# Altium PCB PCB_LED_SHIELD_MOTOR_CONTROLLER_V2.PcbDoc
Units mil, origin at the board's own origin, x right, y up, seen from the top; angles counter-clockwise.
Board outline 1420 x 1420 mil, 4 copper layers (Top Layer, Signal Layer 1, Signal Layer 2, Bottom Layer), stack 30.634 mil thick; 140 components, 121 nets, 505 pads, 89 vias.
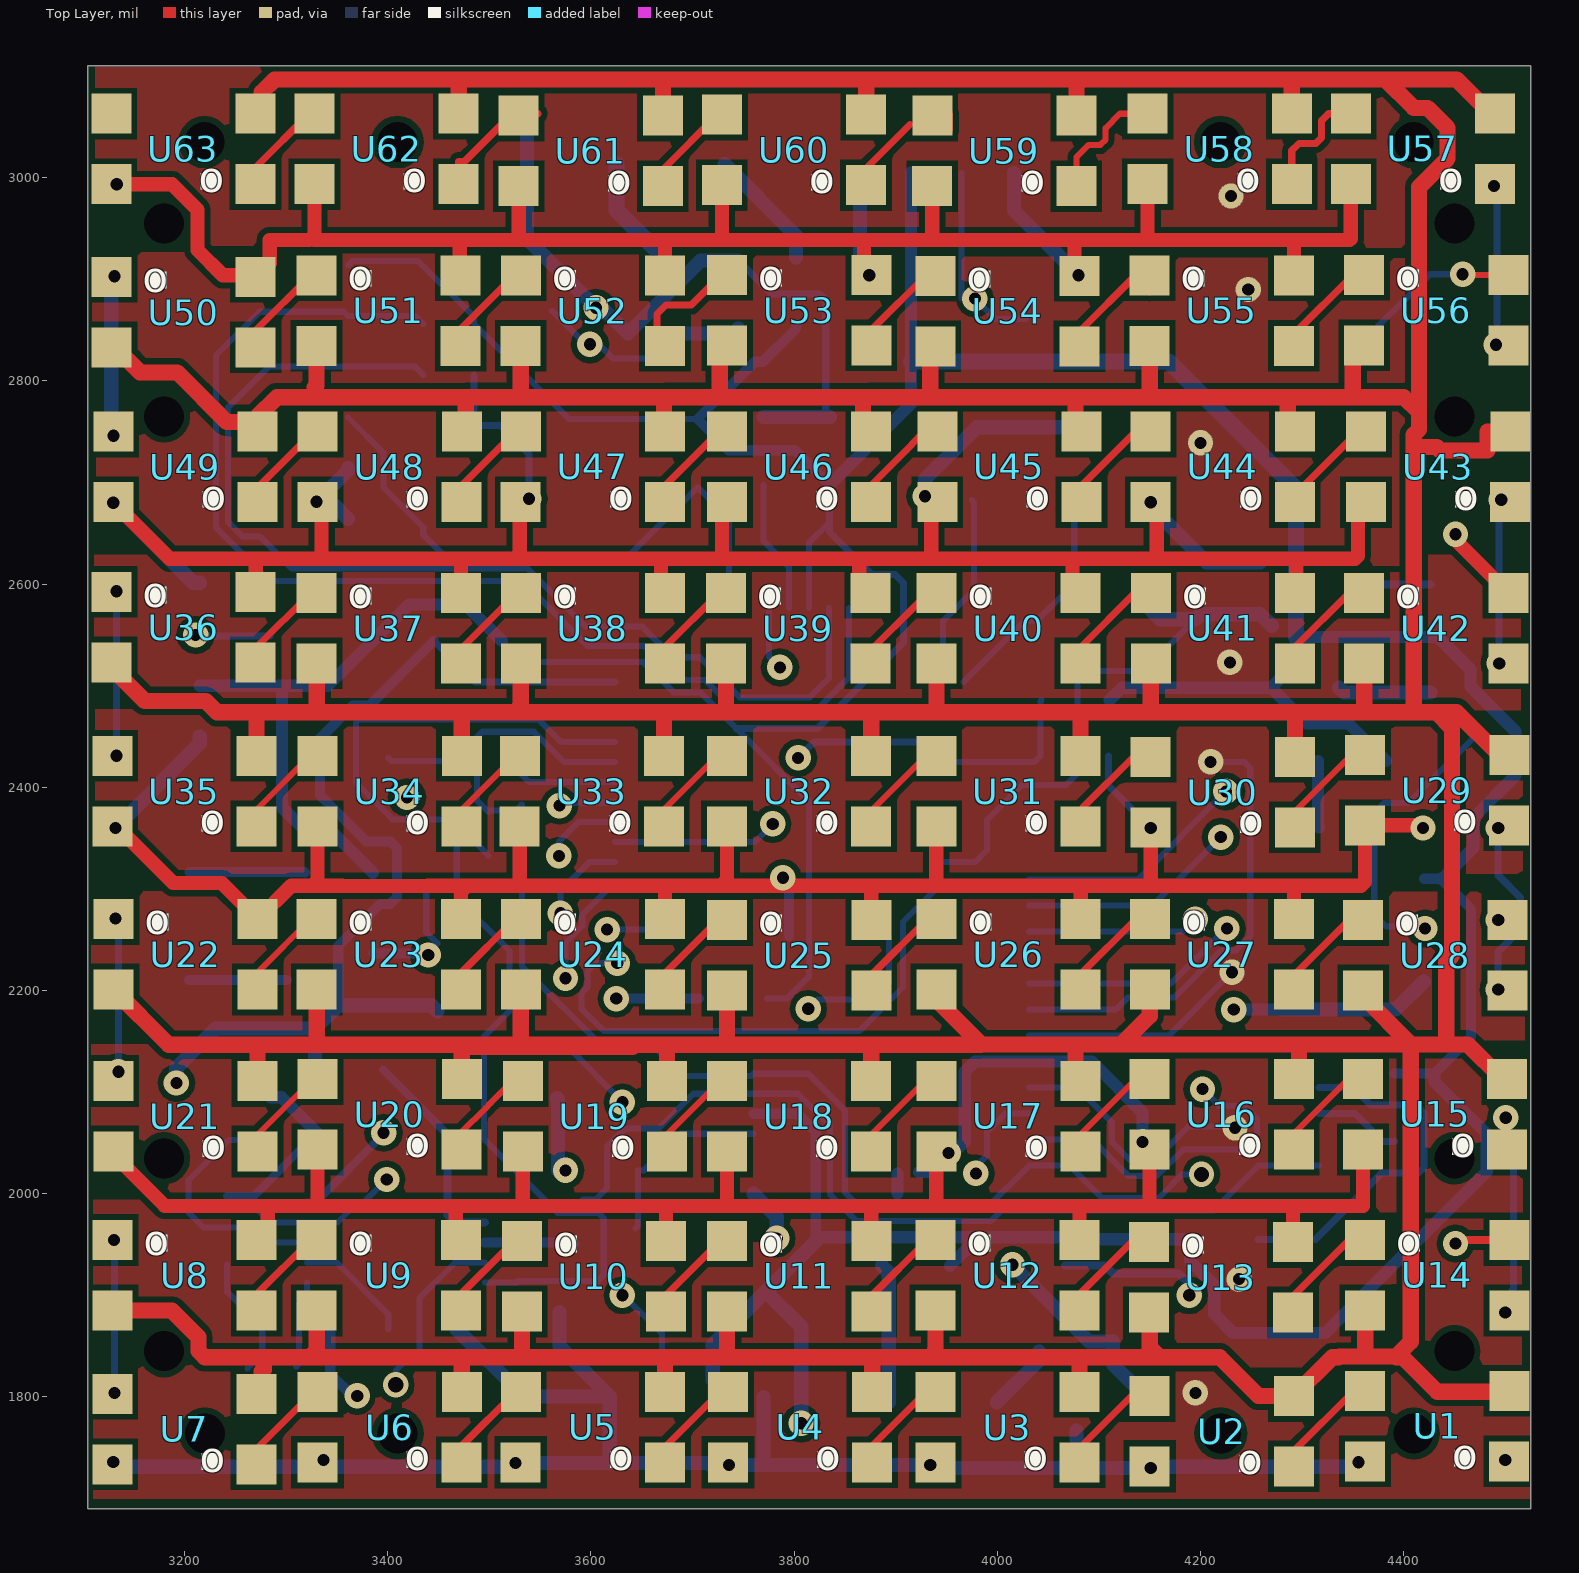
[diagram p0: Top Layer view]
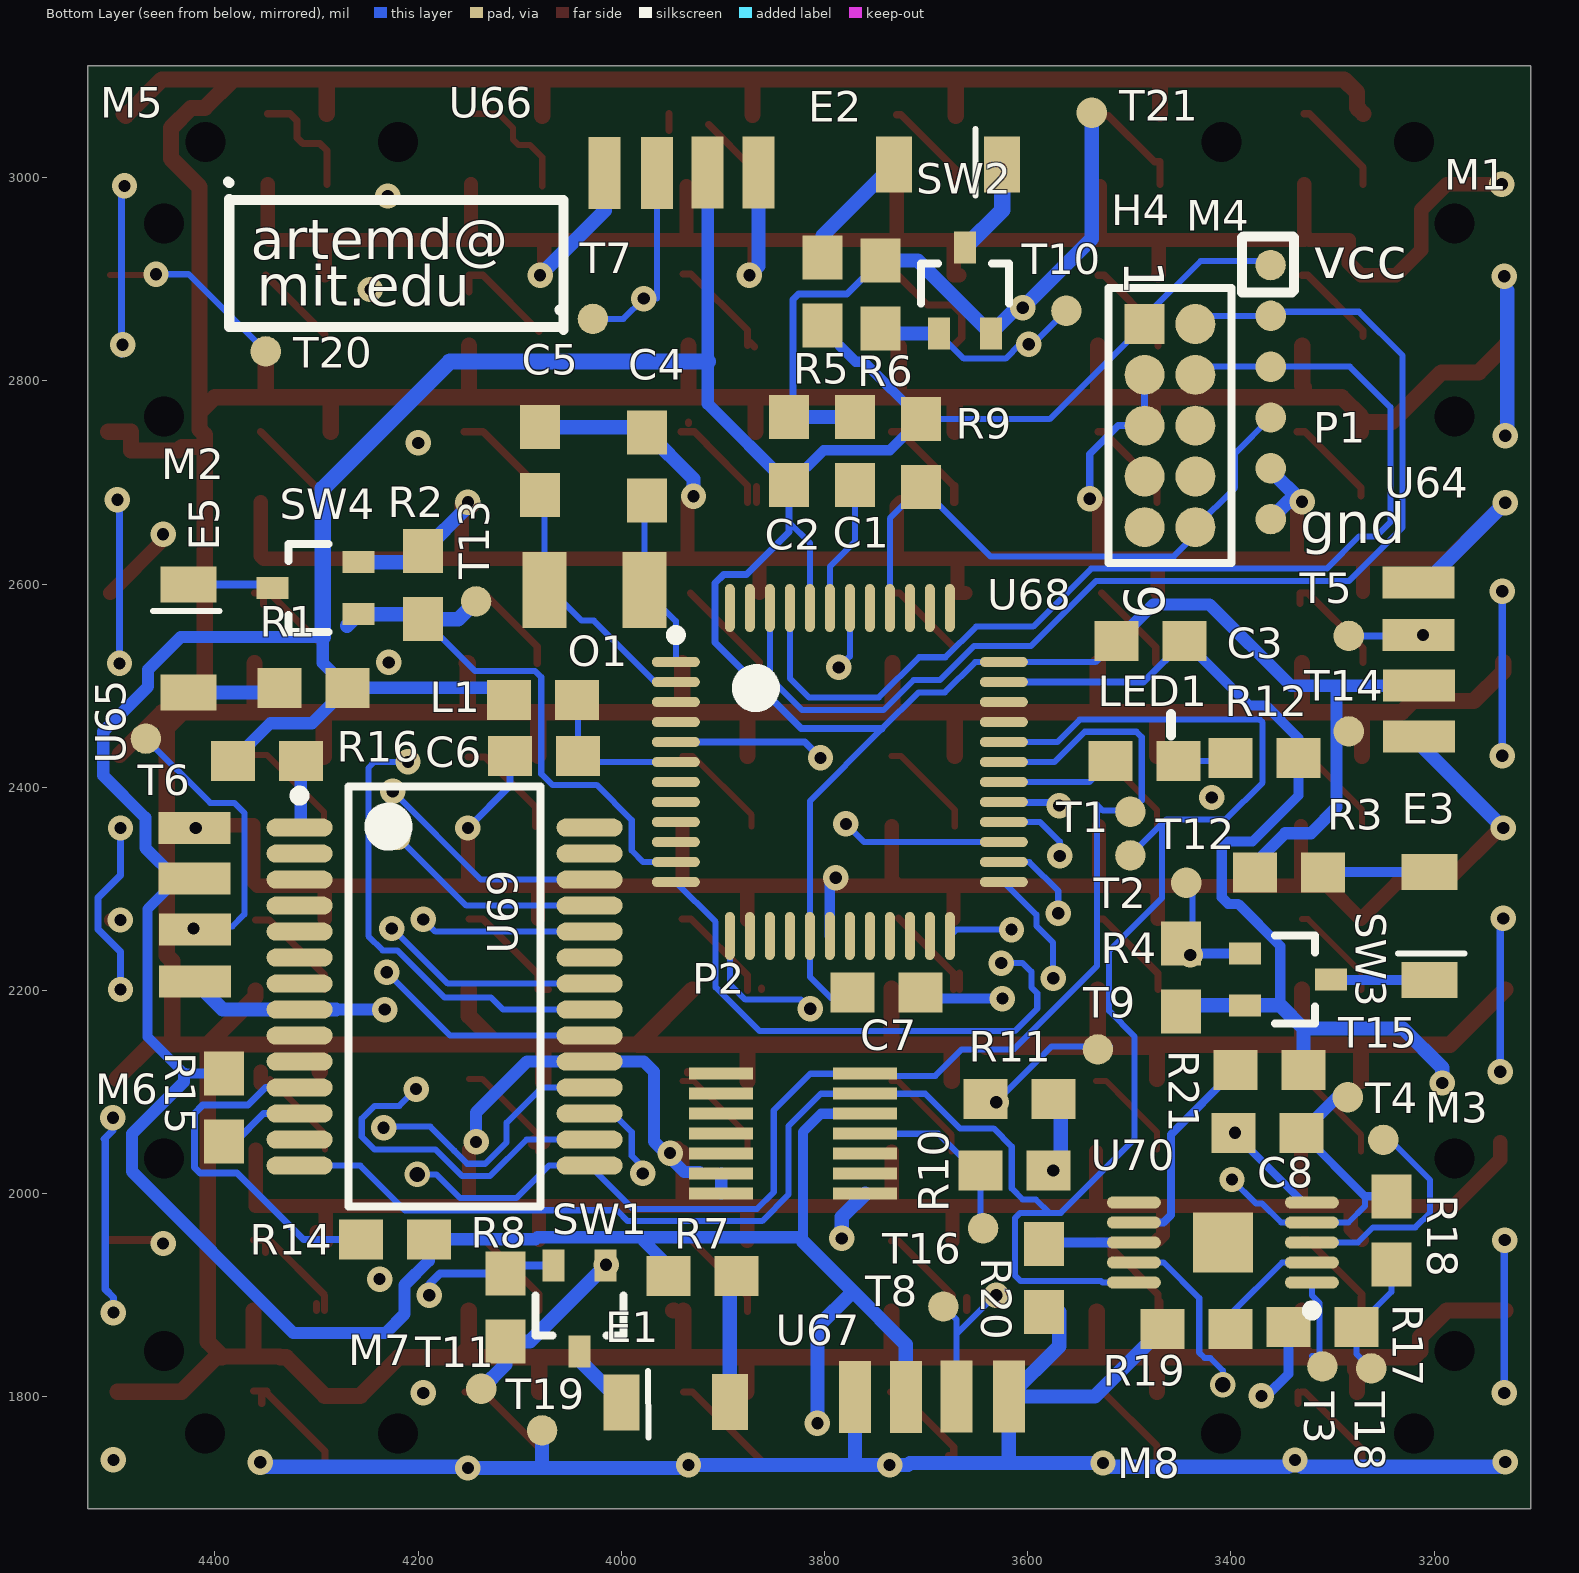
[diagram p1: Bottom Layer view, seen from below]
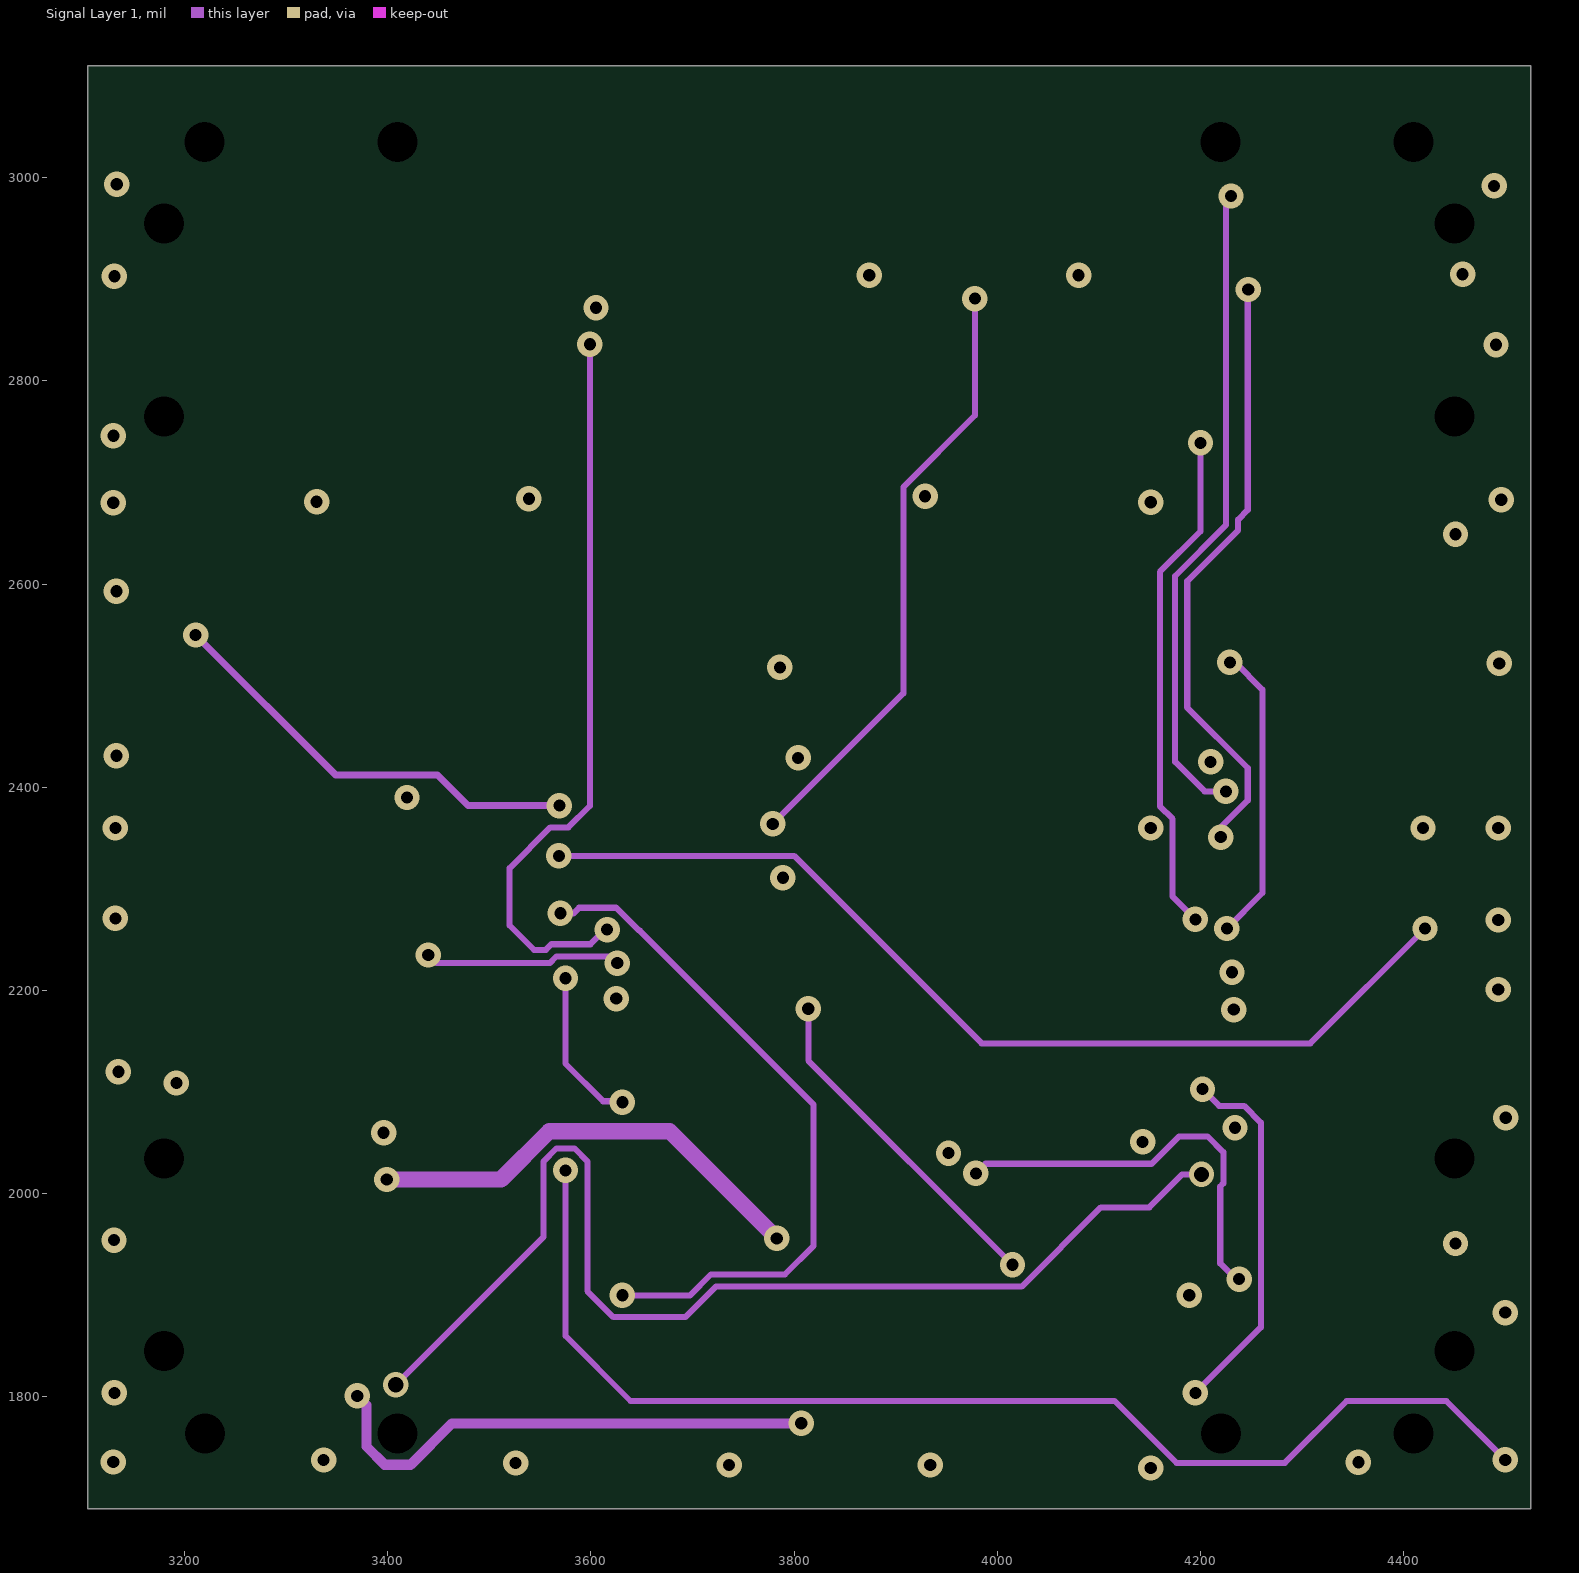
[diagram p2: Signal Layer 1]
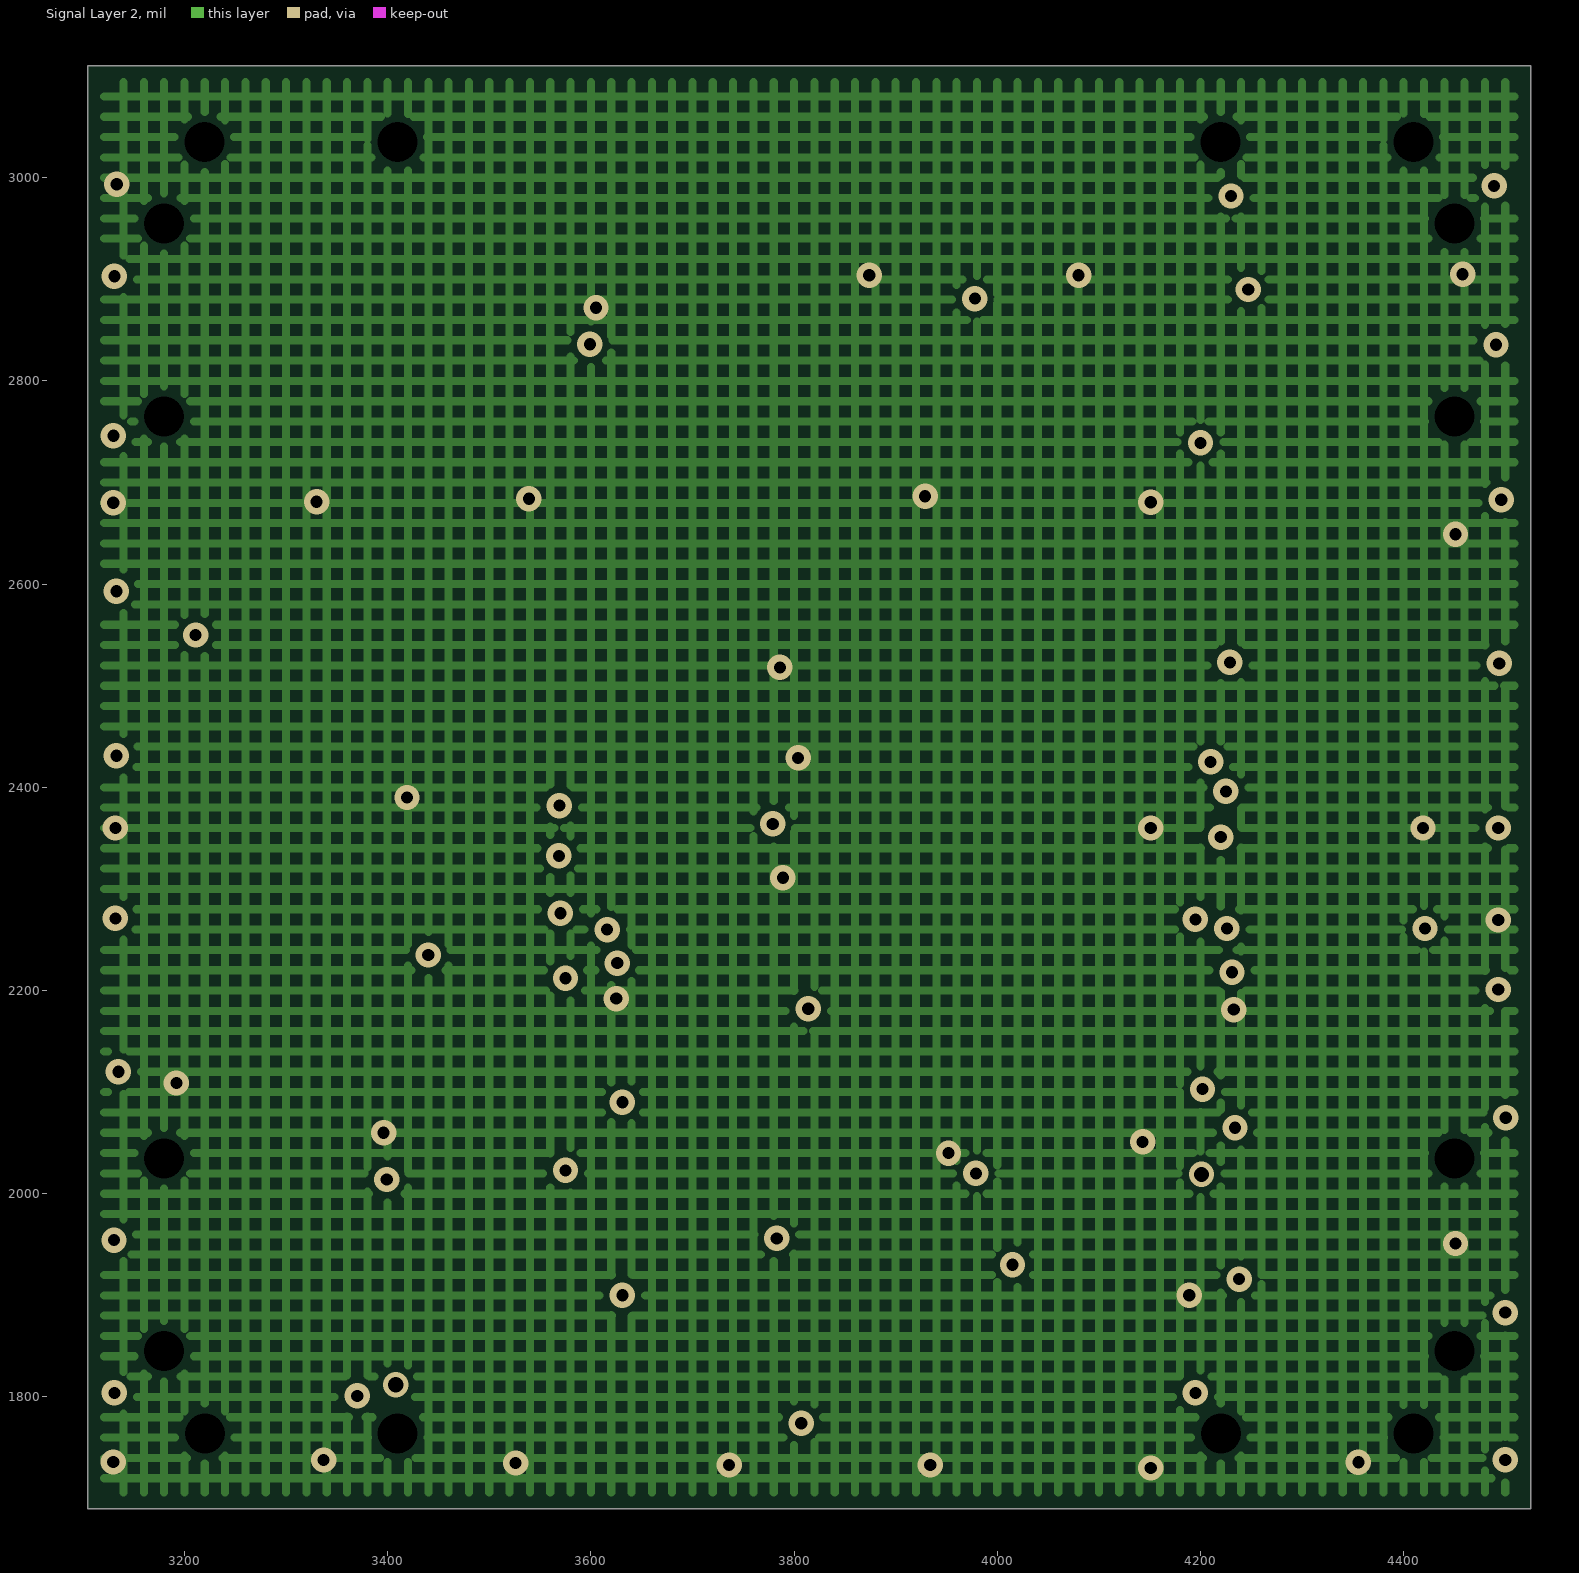
[diagram p3: Signal Layer 2]

## Layer stack, top to bottom
Top Solder: solder mask 0.4, Solder Resist, Dk 3.5
Top Layer: signal copper 1.4
Dielectric 1: core 10, FR-4, Dk 4.2
Signal Layer 1: signal copper 1.417
Dielectric 3: prepreg 5, Dk 4.2
Signal Layer 2: signal copper 1.417
Dielectric 2: core 10, Dk 4.2
Bottom Layer: signal copper 1.4
Bottom Solder: solder mask 0.4, Solder Resist, Dk 3.5

## Board outline
3105,1690 4525,1690 4525,3110 3105,3110

## Design rules (kind name [scope] priority, off if disabled: settings)
Clearance [All] p1: gap=6
ComponentClearance [All] p1: gap=3.94 collisioncheckmode=3 verticalgap=10 showdistances=TRUE
PolygonConnect [All] p1: connectstyle=Direct reliefconductorwidth=10 reliefentries=4 polygonreliefangle="90 Angle" airgapwidth=10
RoutingVias [All] p1: holewidth=15 width=12 viastyle="Through Hole" minholewidth=10 minwidth=12 maxholewidth=100 maxwidth=100
SolderMaskExpansion [All] p1: expansion=4
Width [All] p1: maxlimit=20 minlimit=6 preferedwidth=7
29 further rules are at their usual default settings.

## Classes and differential pairs
component class Schematic_LED_SHIELD_MOTOR_CONTROLLER_V2: U1 U2 U3 U4 U5 U6 U7 U8 U9 U10 U11 U12 U13 U14 U15 U16 U17 U18 U19 U20 U21 U22 U23 U24 U25 U26 U27 U28 U29 U30 U31 U32 U33 U34 U35 U36 U37 U38 U39 U40 U41 U42 U43 U44 U45 U46 U47 U48 U49 U50 U51 U52 U53 U54 U55 U56 U57 U58 U59 U60 U61 U62 U63
component class Schematic_LED_SHIELD_DIGITAL: C1 C2 C4 C5 C6 C7 C8 E1 E2 E3 E5 H4 L1 LED1 M1 M2 M3 M4 M5 M6 M7 M8 O1 P1 P2 R1 R2 R3 R4 R5 R6 R7 R8 R9 R10 R11 R12 R14 R15 R16 R17 R18 R19 R20 R21 SW1 SW2 SW3 SW4 T1 T2 T3 T4 T5 T6 T7 T8 T9 T10 T11 T12 T13 T14 T15 T16 T18 T19 T20 T21 U64 U65 U66 U67 U68 U69 U70

## Components (designator, comment, footprint, x,y, rotation, side; value= is the part's Value field where it differs from the comment)
C1 "0.1uF" 0603W 3770,2730 r90 bottom
C2 "0.1uF" 0603W 3835,2730 r90 bottom
C3 "0.1uF" 0603W 3478,2544 r0 bottom
C4 "18pF" 0603W 3975,2715 r90 bottom
C5 "18pF" 0603W 4080,2720 r90 bottom
C6 "0.1uF" 0603W 4077,2431 r180 bottom
C7 "0.1uF" 0603W 3738,2198 r0 bottom
C8 "10uF" 0603W 3365,2060 r180 bottom
E1 "SFH 4045N" "SFH 4045N" 3915,1775 r180 bottom
E2 "SFH 4045N" "SFH 4045N" 3710,3033 r0 bottom
E3 "SFH 4045N" "SFH 4045N" 3185,2295 r90 bottom
E5 "SFH 4045N" "SFH 4045N" 4446,2515 r270 bottom
H4 "MHDR2X5" MHDR2X5 3485,2856 r270 bottom
L1 "Ferrite bead" 0603W 4076,2486 r0 bottom
LED1 "LED RED" 0603W 3486,2426 r180 bottom
M1 "Custom_magnet_holder" 3mm_magnet_holder 3180.01,2942.48 r270 bottom
M2 "Custom_magnet_holder" 3mm_magnet_holder 4449.98,2777.62 r90 bottom
M3 "Custom_magnet_holder" 3mm_magnet_holder 3180.02,2022.38 r270 bottom
M4 "Custom_magnet_holder" 3mm_magnet_holder 3397,3035 r180 bottom
M5 "Custom_magnet_holder" 3mm_magnet_holder 4397,3035 r180 bottom
M6 "Custom_magnet_holder" 3mm_magnet_holder 4449.99,1857.52 r90 bottom
M7 "Custom_magnet_holder" 3mm_magnet_holder 4232.52,1764.01 r0 bottom
M8 "Custom_magnet_holder" 3mm_magnet_holder 3232.52,1764.01 r0 bottom
O1 "32.768 kHz" "32.768 Crystal" 3980,2595 r0 bottom
P1 "6 pin smd 1.27mm female" "6pos 1.27mm" 3361,2914 r270 bottom
P2 "CONN HEADER 14POS 3MM SMD 0.5MM" "DF12 14Pos Female" 3760,2000 r90 bottom
R1 "300" 0603W 4302,2498 r0 bottom
R2 "10K" 0603W 4195,2598 r90 bottom
R3 "300" 0603W 3344,2316 r180 bottom
R4 "10K" 0603W 3449,2214 r270 bottom
R5 "300" 0603W 3802,2887 r90 bottom
R6 "10K" 0603W 3745,2884 r90 bottom
R7 "300" 0603W 3921,1919 r180 bottom
R8 "10K" 0603W 4114,1887 r90 bottom
R9 "10K" 0603W 3705,2730 r270 bottom
R10 "OPEN" 0603W 3612,2023 r0 bottom
R11 "CLOSED" 0603W 3607,2093 r0 bottom
R12 "330" 0603W 3366,2429 r0 bottom
R14 "4.7K" 0603W 4224,1955 r180 bottom
R15 "4.7K" 0603W 4391,2084 r90 bottom
R16 "20K" 0603W 4350,2426 r180 bottom
R17 "OPEN" 0603W 3309,1869 r0 bottom
R18 "CLOSED" 0603W 3242,1963 r90 bottom
R19 "0.4 Ohn" 0603W 3435,1867 r180 bottom
R20 "10K" 0603W 3584,1918 r270 bottom
R21 "10K" 0603W 3363,2122 r180 bottom
SW1 "MOSFET N CHANNEL" SOT323 4041,1887 r270 bottom
SW2 "MOSFET N CHANNEL" SOT323 3662,2889 r90 bottom
SW3 "MOSFET N CHANNEL" SOT323 3344,2211 r180 bottom
SW4 "MOSFET N CHANNEL" SOT323 4301,2596 r0 bottom
T1 "Test point small" "TEST POINT SMD SUPER SMALL" 3499,2376 r180 bottom
T2 "Test point small" "TEST POINT SMD SUPER SMALL" 3499,2333 r180 bottom
T3 "Test point small" "TEST POINT SMD SUPER SMALL" 3310,1830 r180 bottom
T4 "Test point small" "TEST POINT SMD SUPER SMALL" 3250,2053 r180 bottom
T5 "Test point small" "TEST POINT SMD SUPER SMALL" 3284,2549 r180 bottom
T6 "Test point small" "TEST POINT SMD SUPER SMALL" 4468,2448 r180 bottom
T7 "Test point small" "TEST POINT SMD SUPER SMALL" 4028,2861 r180 bottom
T8 "Test point small" "TEST POINT SMD SUPER SMALL" 3683,1889 r180 bottom
T9 "Test point small" "TEST POINT SMD SUPER SMALL" 3531,2142 r180 bottom
T10 "Test point small" "TEST POINT SMD SUPER SMALL" 3562,2869 r90 bottom
T11 "Test point small" "TEST POINT SMD SUPER SMALL" 4138,1808 r90 bottom
T12 "Test point small" "TEST POINT SMD SUPER SMALL" 3444,2306 r90 bottom
T13 "Test point small" "TEST POINT SMD SUPER SMALL" 4143,2583 r90 bottom
T14 "Test point small" "TEST POINT SMD SUPER SMALL" 3284,2455 r90 bottom
T15 "Test point small" "TEST POINT SMD SUPER SMALL" 3285,2095 r90 bottom
T16 "Test point small" "TEST POINT SMD SUPER SMALL" 3644,1966 r90 bottom
T18 "Test point small" "TEST POINT SMD SUPER SMALL" 3262,1828 r90 bottom
T19 "Test point small" "TEST POINT SMD SUPER SMALL" 4078,1767 r90 bottom
T20 "Test point small" "TEST POINT SMD SUPER SMALL" 4350,2829 r90 bottom
T21 "Test point small" "TEST POINT SMD SUPER SMALL" 3537,3064 r90 bottom
U1 "WS2812B MINI" "WS2812B MINI" 4362,1806 r0 top
U2 "WS2812B MINI" "WS2812B MINI" 4150,1801 r0 top
U3 "WS2812B MINI" "WS2812B MINI" 3939,1805 r0 top
U4 "WS2812B MINI" "WS2812B MINI" 3735,1805 r0 top
U5 "WS2812B MINI" "WS2812B MINI" 3531,1805 r0 top
U6 "WS2812B MINI" "WS2812B MINI" 3331,1805 r0 top
U7 "WS2812B MINI" "WS2812B MINI" 3129,1803 r0 top
U8 "WS2812B MINI" "WS2812B MINI" 3271,1885 r180 top
U9 "WS2812B MINI" "WS2812B MINI" 3472,1885 r180 top
U10 "WS2812B MINI" "WS2812B MINI" 3674,1884 r180 top
U11 "WS2812B MINI" "WS2812B MINI" 3876,1884 r180 top
U12 "WS2812B MINI" "WS2812B MINI" 4081,1885 r180 top
U13 "WS2812B MINI" "WS2812B MINI" 4291,1883 r180 top
U14 "WS2812B MINI" "WS2812B MINI" 4504,1885 r180 top
U15 "WS2812B MINI" "WS2812B MINI" 4360,2113 r0 top
U16 "WS2812B MINI" "WS2812B MINI" 4150,2113 r0 top
U17 "WS2812B MINI" "WS2812B MINI" 3940,2111 r0 top
U18 "WS2812B MINI" "WS2812B MINI" 3734,2111 r0 top
U19 "WS2812B MINI" "WS2812B MINI" 3533,2111 r0 top
U20 "WS2812B MINI" "WS2812B MINI" 3331,2113 r0 top
U21 "WS2812B MINI" "WS2812B MINI" 3130,2111 r0 top
U22 "WS2812B MINI" "WS2812B MINI" 3272,2201 r180 top
U23 "WS2812B MINI" "WS2812B MINI" 3472,2201 r180 top
U24 "WS2812B MINI" "WS2812B MINI" 3673,2201 r180 top
U25 "WS2812B MINI" "WS2812B MINI" 3876,2200 r180 top
U26 "WS2812B MINI" "WS2812B MINI" 4082,2201 r180 top
U27 "WS2812B MINI" "WS2812B MINI" 4292,2201 r180 top
U28 "WS2812B MINI" "WS2812B MINI" 4502,2200 r180 top
U29 "WS2812B MINI" "WS2812B MINI" 4362,2432 r0 top
U30 "WS2812B MINI" "WS2812B MINI" 4151,2430 r0 top
U31 "WS2812B MINI" "WS2812B MINI" 3940,2431 r0 top
U32 "WS2812B MINI" "WS2812B MINI" 3734,2431 r0 top
U33 "WS2812B MINI" "WS2812B MINI" 3530,2431 r0 top
U34 "WS2812B MINI" "WS2812B MINI" 3331,2431 r0 top
U35 "WS2812B MINI" "WS2812B MINI" 3129,2431 r0 top
U36 "WS2812B MINI" "WS2812B MINI" 3270,2523 r180 top
U37 "WS2812B MINI" "WS2812B MINI" 3472,2522 r180 top
U38 "WS2812B MINI" "WS2812B MINI" 3673,2522 r180 top
U39 "WS2812B MINI" "WS2812B MINI" 3875,2522 r180 top
U40 "WS2812B MINI" "WS2812B MINI" 4082,2522 r180 top
U41 "WS2812B MINI" "WS2812B MINI" 4293,2522 r180 top
U42 "WS2812B MINI" "WS2812B MINI" 4503,2522 r180 top
U43 "WS2812B MINI" "WS2812B MINI" 4363,2750 r0 top
U44 "WS2812B MINI" "WS2812B MINI" 4151,2750 r0 top
U45 "WS2812B MINI" "WS2812B MINI" 3941,2750 r0 top
U46 "WS2812B MINI" "WS2812B MINI" 3734,2750 r0 top
U47 "WS2812B MINI" "WS2812B MINI" 3531,2750 r0 top
U48 "WS2812B MINI" "WS2812B MINI" 3331,2750 r0 top
U49 "WS2812B MINI" "WS2812B MINI" 3130,2750 r0 top
U50 "WS2812B MINI" "WS2812B MINI" 3270,2833 r180 top
U51 "WS2812B MINI" "WS2812B MINI" 3471.87,2834.61 r180 top
U52 "WS2812B MINI" "WS2812B MINI" 3672.87,2834.61 r180 top
U53 "WS2812B MINI" "WS2812B MINI" 3876,2835 r180 top
U54 "WS2812B MINI" "WS2812B MINI" 4081,2834 r180 top
U55 "WS2812B MINI" "WS2812B MINI" 4291.87,2834.61 r180 top
U56 "WS2812B MINI" "WS2812B MINI" 4503,2835 r180 top
U57 "WS2812B MINI" "WS2812B MINI" 4348,3063 r0 top
U58 "WS2812B MINI" "WS2812B MINI" 4148,3063 r0 top
U59 "WS2812B MINI" "WS2812B MINI" 3936,3061 r0 top
U60 "WS2812B MINI" "WS2812B MINI" 3729,3062 r0 top
U61 "WS2812B MINI" "WS2812B MINI" 3529,3061 r0 top
U62 "WS2812B MINI" "WS2812B MINI" 3328,3063 r0 top
U63 "WS2812B MINI" "WS2812B MINI" 3128,3063 r0 top
U64 "TSSP77P38" TSSP77P38 3215,2450 r90 bottom
U65 "TSSP77P38" TSSP77P38 4420,2360 r270 bottom
U66 "TSSP77P38" TSSP77P38 3865,3005 r0 bottom
U67 "TSSP77P38" TSSP77P38 3770,1800 r180 bottom
U68 "ATSAMD21G" TQFN48 3785,2415 r180 bottom
U69 "MTCH6102_BIG" SS28 4174,2194 r180 bottom
U70 "DRV8830" MSOP10_TI_POWERPAD 3408,1952 r0 bottom

## Footprints (in the part's own frame and the unit in brackets; to place one, negate y for a bottom-side part, rotate by r counter-clockwise, add the part's x,y. Pads: shape width x height; smd on the part's side, far side on the other; paste and mask are expansions set on the pad)
3mm_magnet_holder [mm] "custom magnet holder"
  round 0 hole 1: 6(-0.318,0) 6(4.505,0)
  body extent -1,-1.02 5.18,1.89, height 3.6
"6pos 1.27mm" [mil]
  round 30 smd: 1(0,0) 2(49.96,0.09) 3(99.99,0.08) 4(150,0.07) 5(200.03,0.06) 6(250.04,0.07)
"32.768 Crystal" [mm] "for BLE radio"
  rect 1.1x1.9 smd: 1(-0.07,0.019) 2(2.432,0.02)
  body extent -0.39,-0.71 2.81,0.78, height 0.9
0603W [mm]
  rect 1.1x1 smd: 1(-0.825,0) 2(0.875,0)
  body extent -0.77,-0.4 0.83,0.4, height 0.8
"DF12 14Pos Female" [mm] "0.5 mm header"
  round 0 all layers, no hole: 0(-0.998,3.194) 0(4.091,3.19)
  rect 0.3x1.6 smd mask+0.07: 1(0,0) 2(0,3.6) 3(0.5,0) 4(0.501,3.6) 5(1,0) 6(1.001,3.6) 7(1.5,0) 8(1.5,3.6) 9(2,0) 10(2,3.6) 11(2.5,0) 12(2.5,3.6) 13(3,0) 14(3,3.6)
  body extent -1.26,-0.6 4.34,4, height 2.2
MHDR2X5 [mm] "Connector; Header; 5x2 Position"
  rect 1x1 smd: 1(0,0)
  round 1 smd: 2(0,1.27) 3(1.27,0) 4(1.27,1.27) 5(2.54,0) 6(2.54,1.27) 7(3.81,0) 8(3.81,1.27) 9(5.08,0) 10(5.08,1.27)
  silkscreen extent -0.9,-0.9 5.98,2.17
MSOP10_TI_POWERPAD [mm] "TSSOP, 10-Leads, Body 3.00x3.00mm, Pitch 0.50mm, Thermal Pad 3.00x2.50mm, IPC Medium Density"
  oval 1.35x0.3 smd: 1(-2.225,1) 2(-2.225,0.5) 3(-2.225,0) 4(-2.225,-0.5) 5(-2.225,-1) 6(2.225,-1) 7(2.225,-0.5) 8(2.225,0) 9(2.225,0.5) 10(2.225,1)
  rect 1.5x1.5 smd: 11(0,0)
  silkscreen extent -2.35,1.58 -2.1,1.82, body extent -1.55,-1.55 1.55,1.55, height 1.1
"SFH 4045N" [mm] "High Power Infrared Emitter (940 nm)"
  rect 0.9x1.4 smd: 1(-2.154,0.502) 2(0.552,0.503)
  silkscreen extent -1.49,-0.38 -1.48,1.28, body extent -2.39,-1.65 0.71,1.1, height 1.3
SOT323 [mm] "Smaller package for SOT23"
  rect 0.8x0.55 smd: 1(-1.075,0.65) 2(-1.075,-0.65) 3(1.075,0)
  silkscreen extent -0.32,-1.1 0.67,1.1, body extent -0.67,-1.1 0.67,1.1, height 1.1
SS28 [mm] "SOP, 28-Leads, Body 10.20x5.30mm, Pitch 0.65mm, IPC Medium Density"
  oval 1.65x0.45 smd mask+0.07: 1(-3.625,4.225) 2(-3.625,3.575) 3(-3.625,2.925) 4(-3.625,2.275) 5(-3.625,1.625) 6(-3.625,0.975) 7(-3.625,0.325) 8(-3.625,-0.325) 9(-3.625,-0.975) 10(-3.625,-1.625) 11(-3.625,-2.275) 12(-3.625,-2.925) 13(-3.625,-3.575) 14(-3.625,-4.225) 15(3.625,-4.225) 16(3.625,-3.575) 17(3.625,-2.925) 18(3.625,-2.275) 19(3.625,-1.625) 20(3.625,-0.975) 21(3.625,-0.325) 22(3.625,0.325) 23(3.625,0.975) 24(3.625,1.625) 25(3.625,2.275) 26(3.625,2.925) 27(3.625,3.575) 28(3.625,4.225)
  silkscreen extent -3.75,-5.25 2.4,5.25, body extent -2.8,-5.25 2.8,5.25, height 2
"TEST POINT SMD SUPER SMALL" [mil]
  round 30 smd: 0(0,0)
TQFN48 [mm] "TSQFP, 48-Leads, Body 7.00x7.00mm, Pitch 0.50mm, IPC High Density"
  oval 1.2x0.25 smd: 1(-4.1,2.75) 2(-4.1,2.25) 3(-4.1,1.75) 4(-4.1,1.25) 5(-4.1,0.75) 6(-4.1,0.25) 7(-4.1,-0.25) 8(-4.1,-0.75) 9(-4.1,-1.25) 10(-4.1,-1.75) 11(-4.1,-2.25) 12(-4.1,-2.75) 25(4.1,-2.75) 26(4.1,-2.25) 27(4.1,-1.75) 28(4.1,-1.25) 29(4.1,-0.75) 30(4.1,-0.25) 31(4.1,0.25) 32(4.1,0.75) 33(4.1,1.25) 34(4.1,1.75) 35(4.1,2.25) 36(4.1,2.75)
  oval 0.25x1.2 smd: 13(-2.75,-4.1) 14(-2.25,-4.1) 15(-1.75,-4.1) 16(-1.25,-4.1) 17(-0.75,-4.1) 18(-0.25,-4.1) 19(0.25,-4.1) 20(0.75,-4.1) 21(1.25,-4.1) 22(1.75,-4.1) 23(2.25,-4.1) 24(2.75,-4.1) 37(2.75,4.1) 38(2.25,4.1) 39(1.75,4.1) 40(1.25,4.1) 41(0.75,4.1) 42(0.25,4.1) 43(-0.25,4.1) 44(-0.75,4.1) 45(-1.25,4.1) 46(-1.75,4.1) 47(-2.25,4.1) 48(-2.75,4.1)
  silkscreen extent -4.23,1.8 -1.8,3.55, body extent -3.5,-3.5 3.5,3.5, height 1.2
TSSP77P38 [mm] "IR Detector for Mid Range Proximity Sensor"
  rect 0.8x1.8 smd: 1(0,0) 2(1.269,-0.001) 3(2.539,0.004) 4(3.845,0.008)
  body extent -1.49,-2.42 5.31,0.78, height 2.94
"WS2812B MINI" [mm]
  rect 1x1 smd: 1(0,0) 2(-0.001,-1.762) 3(3.603,-1.762) 4(3.605,0)
  silkscreen extent 2.23,-1.9 2.66,-1.48, body extent -0.1,-2.82 3.6,0.88, height 1

## Part data
C1 C2 C3 C4 C5 C6 C7 C8: library part Capacitor, "SMD Cap 1206"
E1 E2 E3 E5: "High Power Infrared Emitter (940 nm)"
H4: "Header, 5-Pin, Dual row"
L1: library part "INDUCTOR Low DCR"
LED1: library part LED, "LED SMD 1206/0603"
O1: library part "32.768 Crystal"
R1 R2 R3 R4 R5 R6 R7 R8 R9 R10 R11 R12 R14 R15 R16 R17 R18 R19 R20 R21: library part Resistor
U64 U65 U66 U67: "IR Detector for Mid Range Proximity Sensor"
U68: "IC MCU 32BIT 256KB FLASH 48TQFP"
U70: "Low-Voltage Motor Driver With Serial Interface"

## Via types
v1: diameter 25, hole 12, Top Layer to Bottom Layer, tented both sides, 86 vias
v2: diameter 25, hole 15, Top Layer to Bottom Layer, tented both sides, 2 vias
v3: diameter 25, hole 12, Top Layer to Bottom Layer, 1 vias

## Nets (pads, with @x,y where several pads share a name; then routed paths per layer and width w, separated by ;. In a path a pad name is that pad's centre, name@x,y a point inside that pad or via, vN(x,y) a via of type N, cw(c..) or ccw(c..) an arc to the next point about the centre after c; other vN are vias at no path point)
A7: P2.5
CAP1: U69.26 | length 871.5
  Signal Layer 1 w6: v1(4225,2396) 4204,2396 4175,2425 4175,2608 4225,2658 4225,2977 v1(4230,2982)
  Bottom Layer w6: U69.26 4138.16,2309.16 v1(4225,2396)
CAP2: U69.25 | length 816.1
  Signal Layer 1 w6: v1(4220,2351) 4220,2360.59 4246.5,2387.09 4246.5,2419 4187,2478.5 4187,2603.03 4237,2653.03 4237,2663.5 4246.5,2673 4246.5,2889.5 v1(4247,2890)
  Bottom Layer w6: U69.25 4152.57,2283.57 v1(4220,2351)
CAP3: U69.24 | length 668.8
  Signal Layer 1 w6: v1(4195,2270) 4172.5,2292.5 4172.5,2368.91 4160,2381.41 4160,2612 4200,2652 v1(4200,2739)
  Bottom Layer w6: U69.24 4182.98,2257.98 v1(4195,2270)
CAP4: U69.22 | length 511.3
  Top Layer w6: v1@4225,2262 v1(4226,2261)
  Signal Layer 1 w6: v1(4226,2261) 4261,2296 4261,2496 4234,2523 v1(4229,2523)
  Bottom Layer w6: U69.22 4170.8,2206.8 4225,2261 v1(4226,2261)
CAP5: U69.21 | length 455.6
  Top Layer w6: v1(4210,2425) v1@4211,2425
  Bottom Layer w6: U69.21 4116.41,2181.2 4128.2,2193 4173.97,2193 4220.47,2239.5 4234.91,2239.5 4249,2253.59 4249,2419 4243,2425 v1(4210,2425)
CAP6: U69.20 | length 225.6
  Bottom Layer w6: U69.20 4168.61,2155.61 v1(4231,2218)
CAP7: U69.18 | length 262.3
  Top Layer w6: v1@4233,2066 v1(4234,2065)
  Bottom Layer w6: U69.18 4078.57,2104.43 4113,2070 4113,2050.59 4134.09,2029.5 4151.91,2029.5 4164.5,2042.09 4164.5,2042.5 4188,2066 4233,2066 v1(4234,2065)
CAP8: U69.17 | length 498.8
  Signal Layer 1 w6: v1(3979,2020) 3988.5,2029.5 4151.91,2029.5 4178.91,2056.5 4206.91,2056.5 4222.5,2040.91 4222.5,2010.09 4219.5,2007.09 4219.5,1931.5 4235,1916 v1(4238,1916)
  Signal Layer 2 w6: v1(4238,1916) v1@4238,1920
  Bottom Layer w6: v1(3979,2020) 3979,2026.56 3989.8,2037.36 3989.8,2060.65 4008,2078.84 U69.17
CAP9: U69.16 | length 702.2
  Signal Layer 1 w6: v1(4195,1804) 4259.5,1868.5 4259.5,2069.91 4242.91,2086.5 4218.5,2086.5 v1(4202,2103)
  Bottom Layer w6: U69.16 4093.37,2053.25 4129.12,2017.5 4156.88,2017.5 4182.88,2043.5 4242.91,2043.5 4255.5,2056.09 4255.5,2073.91 4242.91,2086.5 4218.5,2086.5 v1(4202,2103)
DIN_ARM: R11.2 T9.0 U68.25 | length 405.7
  Signal Layer 1 w6: v1(3575,2212) 3575,2128 3612,2091 3630,2091 v1(3631,2090)
  Bottom Layer w6: T9.0@3519,2145 3576.59,2145 3631,2090.59 v1(3631,2090) ; v1(3575,2212) 3575,2247.09 3591.5,2263.59 3591.5,2274.65 U68.25
GND: C1.2 C2.2 C3.1 C4.2 C5.2 C6.1 C7.1 C8.1 H4.3 H4.5 P1.5 P1.6 P2.2 P2.4 R2.2 R4.2 R6.2 R8.2 R12.1 R19.1 R20.2 R21.2 SW1.2 SW2.2 SW3.2 SW4.2 T19.0 T20.0 T21.0 U1.2 U2.2 U3.2 U4.2 U5.2 U6.2 U7.2 U8.2 U9.2 U10.2 U11.2 U12.2 U13.2 U14.2 U15.2 U16.2 U17.2 U18.2 U19.2 U20.2 U21.2 U22.2 U23.2 U24.2 U25.2 U26.2 U27.2 U28.2 U29.2 U30.2 U31.2 U32.2 U33.2 U34.2 U35.2 U36.2 U37.2 U38.2 U39.2 U40.2 U41.2 U42.2 U43.2 U44.2 U45.2 U46.2 U47.2 U48.2 U49.2 U50.2 U51.2 U52.2 U53.2 U54.2 U55.2 U56.2 U57.2 U58.2 U59.2 U60.2 U61.2 U62.2 U63.2 U64.1 U64.4 U65.1 U65.4 U66.1 U66.4 U67.1 U67.4 U68.5 U68.18 U68.35 U68.42 U69.8 U69.19 U70.5 | length 13368.5
  Top Layer w6: v1(4458,2905) 4458.62,2904.38 U56.2
  Top Layer w8: v3@3393,2063 v3(3396,2060) ; v1(4451,1951) 4454.38,1954.38 U14.2
  Top Layer w12: U17.2@3944.34,2046 3950.34,2040 v1(3952,2040) ; v1(4143,2051) 4143,2050.57 U16.2
  Top Layer w14: U63.2 v1(3133.38,2993.62) 3187.61,2993.62 3212.69,2968.54 3212.69,2928.93 3237.61,2904 3271.91,2904 3284,2916.08 3284,2938.61 3322.87,2938.61 3327.95,2943.7 ; v1(3129.95,2680.05) U49.2 3185.57,2625 3274,2625 ; U35.2@3132.95,2361.62 3188.86,2305.71 3236.72,2305.71 U22.2 3272.38,2270.38 3305.06,2303.07 3326,2303.07 ; U7.2@3133.95,1731.31 U7.2@3133.95,1735.62 ; U21.2@3134.95,2050.62 3134.95,2033.73 3180.69,1988 3282,1988 ; U36.2 3270.05,2621.05 3274,2625 ; U8.2 3282,1965.34 3282,1988 ; U62.2 3327.95,2943.7 ; U20.2 3330.95,1990.95 3328,1988 ; U34.2 3330.95,2308.03 3326,2303.07 ; 3334.95,2625.05 U48.2@3334.95,2680.62 ; U51.2 3471,2904.91 3471,2938.61 ; U9.2 3467,1959.43 3467,1988 ; U23.2 3472.05,2297.12 3478,2303.07 ; U37.2 3472.05,2620.95 3468,2625 ; U61.2 3528.95,2938.61 ; U33.2 3529.95,2307.03 3526,2303.07 ; U47.2@3529.95,2680.62 3529.95,2629.95 3525,2625 ; U19.2 3532.95,1988.95 3532,1988 ; U38.2@3661.62,2591.38 3669.05,2591.38 3669.05,2624.95 ; U52.2@3667.48,2904 U52.2 3672.91,2938.53 3673,2938.61 ; U24.2 3673.05,2300.12 ; U10.2 3674.05,1987.05 3675,1988 ; U46.2@3724.95,2680.62 3729,2676.57 3729,2625 ; U60.2 3728.95,2938.61 ; U18.2 3733.95,1988.95 3733,1988 ; U32.2 3733.95,2309.03 3728,2303.07 ; U39.2@3864.05,2591.38 3864.05,2623.95 3863,2625 ; U53.2@3868.91,2903 3868.91,2937.7 3868,2938.61 ; U53.2@3869.92,2904 v1(3874,2904) ; U11.2 3876.05,1986.95 3875,1988 ; U25.2 3876.05,2302.12 3877,2303.07 ; v1(3929,2686.57) 3934.95,2680.62 3934.95,2625.05 3935,2625 ; 3935.95,2942 U59.2 ; U17.2 3939.95,1989.05 3941,1988 ; U31.2 3939.95,2303.12 3940,2303.07 ; U40.2@4074.05,2591.38 4074.05,2623.95 4073,2625 ; U54.2@4075.91,2904 4075.91,2936.7 4074,2938.61 ; U12.2 4081.05,1987.95 4081,1988 ; U26.2 4082.05,2302.03 4081,2303.07 ; 4147.05,1988.05 4149.95,1988.05 U16.2 ; U58.2 4147.95,2938.61 ; v1(4151,2360) 4150.95,2303.12 4151,2303.07 ; v1(4151,2680.57) v1(4151,2680.57) ; U44.2@4154.95,2680.62 4157,2678.57 4157,2625 ; U13.2 4291.05,1983.05 4296,1988 ; U55.2 4291.91,2937.7 4291,2938.61 ; U27.2 4292.05,2299.12 4296,2303.07 ; U41.2@4294.05,2591.38 4294.05,2621.95 4291,2625 ; U13.2@4300.05,1954.38 U13.2@4300.05,1962.05 ; U57.2 4347.95,2940 4346.57,2938.61 4291,2938.61 ; U1.2@4353.62,1735.62 v1(4355.38,1735.62) ; U43.2@4354.95,2680.62 4354.95,2627.95 4352,2625 4291,2625 ; 4359.95,1988 4296,1988 ; 4359.95,1989.95 U15.2 ; v1(4419,2360) 4416.38,2362.62 U29.2 4361.95,2307.03 4358,2303.07 4296,2303.07 ; v1(4451,2649) 4451,2643.43 U42.2 ; v1(4493.05,2269.38) U28.2 ; 3274,2625 3468,2625 ; 3282,1988 3328,1988 ; 3326,2303.07 3355.2,2303.07 3355.27,2303 3439.43,2303 3439.5,2303.07 3478,2303.07 ; 3327.95,2943.7 3327.95,2938.61 3471,2938.61 ; 3328,1988 3467,1988 ; 3467,1988 3532,1988 ; 3468,2625 3525,2625 ; 3471,2938.61 3528.95,2938.61 ; 3478,2303.07 3526,2303.07 ; 3525,2625 3729,2625 ; 3526,2303.07 3728,2303.07 ; 3528.95,2938.61 3673,2938.61 ; 3532,1988 3675,1988 ; 3673,2938.61 3728.95,2938.61 ; 3675,1988 3733,1988 ; 3728,2303.07 3877,2303.07 ; 3728.95,2938.61 3868,2938.61 ; 3729,2625 3863,2625 ; 3733,1988 3875,1988 ; 3863,2625 3935,2625 ; 3868,2938.61 4074,2938.61 ; 3875,1988 3941,1988 ; 3877,2303.07 3940,2303.07 ; 3935,2625 4073,2625 ; 3940,2303.07 4081,2303.07 ; 3941,1988 4081,1988 ; 4073,2625 4157,2625 ; 4074,2938.61 4147.95,2938.61 ; 4081,1988 4296,1988 ; 4081,2303.07 4151,2303.07 ; 4147.95,2938.61 4291,2938.61 ; 4151,2303.07 4296,2303.07 ; 4157,2625 4291,2625
  Bottom Layer w6: U68.42 3775.16,2528.84 v1(3786,2518) ; T20.0 4426,2905 v1(4458,2905)
  Bottom Layer w7: C3.1 3485.94,2503.58 U68.35 ; H4.3 H4.5 3511,2756 3539,2728 v1(3539,2684) ; R6.2 3777.78,2885.67 3825.62,2885.67 3831.19,2880.11 3831.19,2768.26 C2.2 ; v1(3804,2429) 3819.53,2444.53 U68.5 ; C6.1 4109.48,2401.52 v1(4151,2360)
  Bottom Layer w8: U70.5 3328.85,1991.37 C8.1 v3(3396,2060) ; SW1.2 4106.13,1929.32 R8.2 4178.55,1921.45 4189,1911 v1(4189,1900)
  Bottom Layer w10: 3351.41,2185.41 3351.41,2243.81 3392.92,2285.31 3402.69,2285.31 3409.13,2291.76 3409.13,2340.24 3402.69,2346.69 3378.84,2346.69 3333.52,2392 R12.1 3333.52,2448.32 3365.89,2480.69 3382.2,2480.69 C3.1 ; v1(3625,2192) C7.1@3706.52,2192 ; v1(3789,2311) 3790,2311 3794.84,2306.16 U68.18
  Bottom Layer w12: P2.2@3901.71,2000.12 P2.4 ; P2.4@3923.08,2021.49 3938.18,2021.49 3968,2051.3 3968,2120 3978.02,2130.02 U69.19 4093,2130.02 4143,2080.02 v1(4143,2051) ; v1(4232.8,2181.2) 4281,2181.2
  Bottom Layer w14: v1(3129.95,1735.95) 3134.59,1731.31 3330.31,1731.31 v1(3336.95,1737.95) 3343.6,1731.31 3522.31,1731.31 v1(3525.95,1734.95) 3621,1734.95 ; v1(3129.95,2680.05) 3208.63,2601.37 U64.4 ; v1(3132,2360) 3215,2443 U64.1 ; v1(3192,2109) 3192,2124 3230.55,2162.55 3328.55,2162.55 ; R21.2 3328.55,2162.55 ; P1.6 3343.9,2681 v1(3330,2681) 3360.94,2711.94 P1.5 ; R4.2 3443.14,2185.41 SW3.2 3351.41,2185.41 3328.55,2162.55 ; R19.1 3534.17,1800.32 U67.4 ; T21.0 3537,2940 v1(3605,2872) 3611.09,2872 SW2.2 3708.18,2918.45 R6.2 ; R20.2@3569,1883.55 3569,1849.95 U67.4 ; U67.1 3770,1733.95 3771,1732.95 ; C1.2 C2.2 ; U66.1 3865,2913 v1(3874,2904) ; v1(3929,2686.57) 3929,2703.45 C4.2 3980,2754.45 C5.2 ; U66.4 4016.37,2967.63 v1(4080,2904) ; T19.0 4078,1734 4082,1730 ; v1(4151,2680.57) 4151,2676.45 R2.2 4205.86,2621.59 SW4.2 ; 4281,2181.2 U69.8 4392.26,2181.2 U65.4 ; v1(4355.38,1735.62) 4351.08,1731.31 4152.31,1731.31 v1(4151,1730) 4082,1730 ; U67.4 3618.63,1737.32 3621,1734.95 ; 3621,1734.95 3715.95,1734.95 3717.95,1732.95 3771,1732.95 ; 3771,1732.95 v1(3933.95,1732.95) 3931,1730 4082,1730
  other v1: 3736,1732.95 3419,2390
INT: R14.1 U69.11 | length 360.2
  Bottom Layer w7: R14.1 4313,1955 4378.37,2020.37 4414.62,2020.37 4420.19,2025.93 4420.19,2079.11 4412,2087.3 4367.38,2087.3 4350.24,2104.43 U69.11
IROUT1: T5.0 U64.3 U68.29 | length 557.1
  Signal Layer 1 w7: v1(3210.96,2549.96) 3348.91,2412 3449,2412 3479,2382 v1(3569,2382)
  Bottom Layer w7: v1(3210.96,2549.96) U64.3 3216.13,2549 T5.0 ; v1(3569,2382) 3572,2385 3623.11,2385 U68.29
IROUT2: T6.0 U65.3 U68.28 | length 1335.8
  Signal Layer 1 w6: v1(3568.5,2332.5) 3800,2332.5 3984.5,2148 4308,2148 v1(4421,2261)
  Bottom Layer w6: v1(3568.5,2332.5) 3568.5,2346.5 3587.79,2365.79 U68.28 ; v1(4421,2261) 4419,2263 4383,2263 4371,2275 4371,2374.91 4380.84,2384.75 4404.75,2384.75 T6.0
IROUT3: T7.0 U66.3 U68.27 | length 958.8
  Top Layer w6: v1@3977,2880 v1(3978,2881)
  Signal Layer 1 w6: v1(3779,2364) 3907.5,2492.5 3907.5,2695.48 3978,2765.98 v1(3978,2881)
  Bottom Layer w6: U68.27 3761.1,2346.1 v1(3779,2364) ; U66.3 3964.96,2881.04 v1(3978,2881) v1(3978,2881) 3998,2861 T7.0
IROUT4: T8.0 U67.3 U68.26 | length 915.3
  Signal Layer 1 w6: v1(3570,2276) 3583,2276 3588.5,2281.5 3624.91,2281.5 3647.5,2258.91 3648.09,2258.91 3819,2088 3819,1948.5 3791,1920.5 3718.12,1920.5 3697.62,1900 v1(3631,1900)
  Bottom Layer w6: v1(3570,2276) 3570,2298 3598.42,2326.42 U68.26 ; v1(3631,1900) 3632.04,1900 3670.04,1862 ; U67.3 3670.04,1862 ; T8.0 3670.04,1876.04 3670.04,1862
IRPWM1: R2.1 SW4.1 T13.0 U68.11 | length 562
  Bottom Layer w6: U68.11 3978.42,2326.42 3989.8,2337.8 3989.8,2367.74 4024.38,2402.31 4067.93,2402.31 4078.83,2413.21 4078.83,2508.44 4085.07,2514.69 4144.17,2514.69 R2.1
  Bottom Layer w14: T13.0 4160.48,2565.52 R2.1 4199.89,2570.41 SW4.1 4270.09,2559
IRPWM2: R4.1 SW3.1 T12.0 U68.12 | length 849.1
  Signal Layer 1 w6: v1(3440,2235) 3448,2227 3559.59,2227 3566.09,2233.5 3619.5,2233.5 v1(3626,2227)
  Bottom Layer w6: T12.0 3438,2300 3438,2257.48 R4.1 ; v1(3626,2227) 3605,2227 3596.5,2218.5 3596.5,2203.09 3590.7,2197.3 3590.7,2182.24 3612.94,2160 3863.97,2160 3907.19,2203.22 3907.19,2267.5 U68.12
  Bottom Layer w10: SW3.1 R4.1@3439.11,2236.59
IRPWM3: R6.1 SW2.1 T10.0 U68.24 | length 1007.5
  Signal Layer 1 w6: v1(3599,2836) 3599,2381.59 3577.91,2360.5 3560.09,2360.5 3520,2320.41 3520,2264 3544,2240 3555.62,2240 3561.12,2245.5 3599.5,2245.5 3614,2260 v1(3616,2260)
  Bottom Layer w6: T10.0 3595,2836 v1(3599,2836) 3607.78,2836 3621.85,2821.93 3662.84,2821.93 SW2.1 ; v1(3616,2260) 3670.32,2260 U68.24
  Bottom Layer w14: SW2.1 3740.16,2846.68 R6.1
IRPWM4: R8.1 SW1.1 T11.0 U68.13 | length 657.9
  Signal Layer 1 w6: v1(3814,2182) 3814,2131 v1(4015,1930)
  Bottom Layer w6: v1(3814,2182) 3823,2191 3878,2191 3893.27,2206.27 U68.13
  Bottom Layer w14: SW1.1 4090.21,1854.52 R8.1 4114,1832 T11.0
LED1: LED1.1 U68.30 | length 113.7
  Bottom Layer w6: LED1.1 3539.32,2405.16 U68.30
M1: T4.0 U70.3 | length 223.1
  Bottom Layer w6: T4.0 3243.48,2053 3204,2013.52 3204,1981.38 3218.59,1966.8 3260.2,1966.8 3275,1952 U70.3
M2: T3.0 U70.1 | length 97.6
  Bottom Layer w6: T3.0 3320.31,1840.31 3312.8,1840.31 3312.8,1892.41 3320.4,1900.02 U70.1
MISO: P2.8
MOSI: P2.6
NetC1_1: C1.1 U68.43 | length 131.4
  Bottom Layer w6: C1.1 3770,2642 3794.84,2617.16 U68.43
NetC4_1: C4.1 O1.1 U68.1 | length 173
  Bottom Layer w6: U68.1 3946.42,2563.41 O1.1 3977.25,2680.27 C4.1
NetC5_1: C5.1 O1.2 U68.2 | length 241.8
  Bottom Layer w6: U68.2@3966.58,2503.58 4027,2564 4039,2564 4069.22,2594.22 O1.2 4075.74,2683.26 C5.1
NetC6_2: C6.2 L1.1 U68.6 | length 154.1
  Bottom Layer w6: U68.6 4036.39,2424.84 C6.2 4042.55,2485.03 L1.1
NetE1_1: E1.1 SW1.3 | length 67
  Bottom Layer w14: E1.1 4041,1835.95 SW1.3
NetE1_2: E1.2 R7.2 | length 137
  Bottom Layer w14: R7.2@3886.55,1929 3893.27,1922.28 E1.2
NetE2_1: E2.1 SW2.3 | length 97.2
  Bottom Layer w16: E2.1 3625.21,2968.11 SW2.3
NetE2_2: E2.2 R5.2 | length 120.9
  Bottom Layer w14: E2.2 3802,2942.93 R5.2
NetE3_1: E3.1 SW3.3 | length 96.1
  Bottom Layer w10: E3.1 SW3.3@3300.89,2210.21
NetE3_2: E3.2 R3.2 | length 114.1
  Bottom Layer w10: E3.2 3317.82,2316.73 R3.2@3318.55,2316
NetE5_1: E5.1 SW4.3 | length 79.1
  Bottom Layer w8: SW4.3@4347.11,2599.79 E5.1
NetE5_2: E5.2 R1.2 | length 91.7
  Bottom Layer w14: R1.2 4341.18,2493.27 E5.2
NetLED1_2: LED1.2 R12.2 | length 52.3
  Bottom Layer w6: R12.2 3403.45,2426 LED1.2
NetR10_1: R10.1 R11.1 U1.3 | length 1268
  Signal Layer 1 w6: v1(3575,2023) 3575,1860 3639,1796 4115.41,1796 4176.41,1735 4283,1735 4344,1796 4442,1796 v1(4500,1738)
  Bottom Layer w14: R11.1@3566.52,2094 3567.52,2093 3567.52,2023 v1(3575,2023)
NetR16_2: R16.2 U69.1 | length 66.1
  Bottom Layer w12: R16.2 4315.55,2361.5 U69.1
NetR17_1: R17.1 R18.1 T18.0 | length 122.8
  Bottom Layer w6: R18.1 3242,1903.52 R17.1 3276.52,1842.52 T18.0
NetR19_2: R19.2 U70.2 | length 115.7
  Bottom Layer w6: U70.2 3349.69,1932.31 3400.55,1881.45 R19.2
NetR20_1: R20.1 U70.8 | length 89
  Bottom Layer w10: U70.8 3582.48,1952 R20.1
NetR21_1: R21.1 U70.7 | length 208.9
  Bottom Layer w8: R21.1 3459.02,2058.46 3459.02,1978.98 3466.32,1971.68 U70.7
NetU1_1: U1.1 U2.3 | length 125.7
  Top Layer w7: U2.3 4291.87,1746.87 4350,1805 4354,1805 U1.1@4354,1793.75 ; U1.1@4349,1806 U1.1
NetU2_1: U2.1 U3.3 | length 110.2
  Top Layer w7: U3.3 4080.87,1749.87 4136,1805 4151,1805 U2.1@4154,1805
NetU3_1: U3.1 U4.3 | length 109.4
  Top Layer w7: U4.3@3864.61,1735.61 3861.87,1735.61 3861.87,1736.87 3930,1805 U3.1
NetU4_1: U4.1 U5.3 | length 113.2
  Top Layer w7: U5.3@3670.87,1735.61 U5.3@3672.87,1737.61 ; U5.3 U5.3@3672.87,1737.61 ; U5.3@3677.72,1742.47 U5.3@3672.87,1737.61 ; U4.1@3720,1801.28 U4.1@3720,1805 ; U4.1 3727,1805 3672.87,1750.87 U5.3@3672.87,1737.61
NetU5_1: U5.1 U6.3 | length 96.4
  Top Layer w7: U6.3 3472.87,1751.87 3526,1805 U5.1
NetU6_1: U6.1 U7.3 | length 109.9
  Top Layer w7: U7.3 3270.87,1748.87 3327,1805 U6.1 ; U6.1@3334,1793.75 U6.1@3334,1805
NetU7_1: U7.1 U8.3 | length 150.5
  Bottom Layer w7: v1(3130.61,1954.39) 3131,1954 v1(3131,1804)
NetU8_1: U8.1 U9.3 | length 110.5
  Top Layer w7: U8.1 3271,1901 3324.39,1954.39 U9.3 ; U8.1@3272,1885 U8.1@3272,1898.25
NetU9_1: U9.1 U10.3 | length 122.1
  Top Layer w7: U9.1@3470,1885 U9.1@3470,1894 ; U9.1 3472,1901 U10.3@3518.13,1947.13 ; U10.3@3518.13,1939.13 U10.3@3518.13,1947.13 ; U10.3@3518.13,1954.39 U10.3@3518.13,1947.13 ; U10.3 3524.39,1953.39 U10.3@3518.13,1947.13
NetU10_1: U10.1 U11.3 | length 111.2
  Top Layer w7: U10.1@3660,1885 U10.1@3660,1898 ; U10.1 3674,1900 3727.39,1953.39 U11.3
NetU11_1: U11.1 U12.3 | length 110.1
  Top Layer w7: U11.1 3876,1899 3931.39,1954.39 U12.3 U12.3@3948.13,1954.39
NetU12_1: U12.1 U13.3 | length 108.5
  Top Layer w7: U12.1 4081,1901 4134.39,1954.39 U13.3@4150.13,1954.39 ; U13.3@4158.13,1953.13 U13.3@4158.13,1954.39
NetU13_1: U13.1 U14.3 | length 126.9
  Top Layer w7: U13.1@4292,1885 4292,1900 4346.39,1954.39 U14.3@4350.13,1954.39 ; U13.1@4300,1885 U13.1@4300,1892 ; U14.3@4350.13,1942.13 U14.3@4350.13,1954.39 ; U14.3 U14.3@4350.13,1954.39
NetU14_1: U14.1 U15.3 | length 207.9
  Top Layer w7: U14.1@4492,1885 4494,1883 v1(4500,1883)
  Bottom Layer w7: v1(4500,1883) 4500,1898 4508,1906 4508,2053 4509,2054 4500.5,2062.5 v1(4500.5,2074.81)
NetU15_1: U15.1 U16.3 | length 103.1
  Top Layer w6: U16.3 4291.87,2058.87 U15.1@4346,2113
  Top Layer w14: U15.1@4355,2108.75 U15.1@4355,2120
NetU16_1: U16.1 U17.3 | length 116
  Top Layer w6: U17.3 4081.87,2050.61 4081.87,2057.87 4137,2113 U16.1
  Top Layer w14: U17.3@4076.87,2050.61 4081.87,2050.61 U17.3@4085.61,2050.61
NetU17_1: U17.1 U18.3 | length 103.6
  Top Layer w6: U18.3 3875.87,2057.87 3929,2111 U17.1
  Top Layer w7: U17.1@3935,2118.75 U17.1@3935,2120
NetU18_1: U18.1 U19.3 | length 97.4
  Top Layer w6: U19.3 3674.87,2057.87 3728,2111 U18.1
NetU19_1: U19.1 U20.3 | length 98.2
  Top Layer w6: U20.3 3472.87,2060.87 3496.31,2084.31 ; 3496.33,2084.31 3501.6,2089.58 3523,2111 U19.1
NetU20_1: U20.1 U21.3 | length 98.2
  Top Layer w6: U21.3 3271.87,2057.87 3327,2113 U20.1
NetU21_1: U21.1 U22.3 | length 152.2
  Bottom Layer w7: v1(3132,2271) 3135,2268 v1(3135,2120)
NetU22_1: U22.1 U23.3 | length 91.1
  Top Layer w6: U22.1@3272,2218 3324.39,2270.39 U23.3
  Top Layer w7: U22.1 U22.1@3272,2212.25
NetU23_1: U23.1 U24.3 | length 97.2
  Top Layer w7: U23.1 3472,2217 3525.39,2270.39 U24.3
NetU24_1: U24.1 U25.3 | length 109.2
  Top Layer w7: U24.1@3667,2201 U24.1@3667,2217.25 ; U24.1 3673,2217 U25.3@3727.39,2271.39
NetU25_1: U25.1 U26.3 | length 103.3
  Top Layer w7: U25.1@3862,2201 U25.1@3862,2202.25 ; U25.1 3876,2215 3931.39,2270.39 U26.3
NetU26_1: U26.1 U27.3 | length 114.4
  Top Layer w7: U26.1@4072,2201 U26.1@4080.75,2201 ; U26.1 4082,2216 4136.39,2270.39 U27.3
NetU27_1: U27.1 U28.3 | length 104.7
  Top Layer w7: U27.1 4292,2215 4346.39,2269.39 U28.3
NetU28_1: U28.1 U29.3 | length 178.3
  Top Layer w7: U28.1@4492,2201 v1(4493,2201)
  Bottom Layer w7: v1(4493,2201) 4493,2238.23 4515.05,2260.27 4515.05,2291.38 4493,2313.43 v1(4493,2360)
NetU29_1: U29.1 U30.3 | length 107.6
  Top Layer w6: U30.3 4292.87,2375.87 4349,2432 U29.1
NetU30_1: U30.1 U31.3 | length 105.8
  Top Layer w7: U31.3@4084.61,2361.61 4084.61,2380.61 4134,2430 U30.1
NetU31_1: U31.1 U32.3 | length 103.5
  Top Layer w6: U32.3@3871.87,2361.61 3871.87,2372.87 3930,2431 U31.1
NetU32_1: U32.1 U33.3 | length 100.4
  Top Layer w6: U33.3 3671.87,2377.87 3725,2431 U32.1
NetU33_1: U33.1 U34.3 | length 95.4
  Top Layer w6: U34.3 3472.87,2377.87 3526,2431 U33.1
NetU34_1: U34.1 U35.3 | length 98.4
  Top Layer w6: U35.3 3270.87,2377.87 3324,2431 U34.1
NetU35_1: U35.1 U36.3 | length 162
  Bottom Layer w7: v1(3133,2431) v1(3133,2593)
NetU36_1: U36.1 U37.3 | length 106.9
  Top Layer w7: U36.1 3270,2537 3324.39,2591.39 U37.3 ; U37.3@3332.13,2581.13 U37.3@3332.13,2591.39
NetU37_1: U37.1 U38.3 | length 91.4
  Top Layer w7: U37.1@3474,2522 3474,2538.25 U38.3@3527.13,2591.39
NetU38_1: U38.1 U39.3 | length 82.2
  Top Layer w7: U38.1@3673,2538 3726.39,2591.39 U39.3
NetU39_1: U39.1 U40.3 | length 97.6
  Top Layer w7: U39.1@3864,2522 3864,2523.25 U40.3@3932.13,2591.39
NetU40_1: U40.1 U41.3 | length 106.9
  Top Layer w7: U40.1@4082.75,2522 4082.75,2538.75 4135.39,2591.39 U41.3
NetU41_1: U41.1 U42.3 | length 117.5
  Top Layer w7: U41.1 4293,2538 4346.39,2591.39 U42.3@4352.13,2591.39 ; U42.3@4352.13,2580.13 U42.3@4352.13,2591.39 ; U42.3 U42.3@4352.13,2591.39
NetU42_1: U42.1 U43.3 | length 161.8
  Bottom Layer w7: v1(4494,2522) 4494,2681 v1(4496,2683)
NetU43_1: U43.1 U44.3 | length 93.5
  Top Layer w7: U44.3@4296.87,2680.61 4296.87,2691.87 U43.1@4355,2750
NetU44_1: U44.1 U45.3 | length 126.6
  Top Layer w7: U45.3@4076.87,2680.61 U45.3@4076.87,2696.87 ; U45.3 4082.87,2696.87 4136,2750 U44.1 U44.1@4155,2750
NetU45_1: U45.1 U46.3 | length 120.5
  Top Layer w7: U46.3@3866.87,2680.61 U46.3@3866.87,2695.87 ; U46.3 3875.87,2697.15 3916,2737.28 3916,2738 3928,2750 U45.1 ; U45.1@3933.87,2758.36 U45.1@3933.87,2759.61
NetU46_1: U46.1 U47.3 | length 115.6
  Top Layer w7: U47.3@3671.87,2680.61 U47.3@3671.87,2696.87 ; U47.3 3672.87,2696.87 3726,2750 U46.1
NetU47_1: U47.1 U48.3 | length 96.6
  Top Layer w7: U48.3 3472.87,2697.15 3525.72,2750 U47.1
NetU48_1: U48.1 U49.3 | length 94
  Top Layer w7: U49.3@3271.87,2686.87 3271.87,2694.87 3327,2750 U48.1@3335,2750
NetU49_1: U49.1 U50.3 | length 147.8
  Top Layer w14: U49.1@3128.87,2755.61 U49.1@3128.87,2759.61
  Bottom Layer w14: 3128,2889 3128,2748 v1(3130,2746)
  other v1: 3131,2903
NetU50_1: U50.1 U51.3 | length 88.1
  Top Layer w7: U50.1@3270,2844 3270,2849.53 3324.47,2904 U51.3
NetU51_1: U51.1 U52.3 | length 97.6
  Top Layer w7: U51.1 3471.87,2851.15 3524.72,2904 U52.3
NetU52_1: U52.1 U53.3 | length 112
  Top Layer w7: U52.1 3665,2842.48 3665,2866 3673.81,2874.81 3698.81,2874.81 U53.3@3727,2903
NetU53_1: U53.1 U54.3 | length 107.1
  Top Layer w7: U53.1@3868.87,2833.61 U53.1@3873.13,2837.87 ; U53.1 3876,2850 3931.39,2905.39 U54.3@3939.13,2905.39
NetU54_1: U54.1 U55.3 | length 108.2
  Top Layer w7: U54.1@4081,2848.7 4136.3,2904 U55.3 U55.3@4150,2887.75
NetU55_1: U55.1 U56.3 | length 82.2
  Top Layer w7: U55.1@4291.87,2845.87 U56.3@4350,2904
NetU56_1: U56.1 U57.3 | length 168.7
  Top Layer w7: v1(4490.87,2835.61) U56.1@4491.87,2834.61
  Bottom Layer w7: v1(4489,2992) 4492,2989 v1@4492,2826
NetU57_1: U57.1 U58.3 | length 116.1
  Top Layer w7: U58.3 4289.87,3026.87 4296.81,3033.81 4313.53,3033.81 4319.1,3039.38 4319.1,3056.1 4326,3063 U57.1
NetU58_1: U58.1 U59.3 | length 123.1
  Top Layer w6: U59.3 4077.87,3020.18 4090,3032.31 4101.33,3032.31 4106.6,3037.58 4106.6,3048.91 4120.69,3063 U58.1
NetU59_1: U59.1 U60.3 | length 93.8
  Top Layer w7: U60.3 3870.87,3009.15 3914,3052.28 ; U59.1@3953,3046.75 U59.1@3953,3063
NetU60_1: U60.1 U61.3 | length 97
  Top Layer w7: U61.3 3670.87,3008.15 3724.72,3062 U60.1
NetU61_1: U61.1 U62.3 | length 117.4
  Top Layer w7: U62.3 3469.87,3015.68 3475.4,3015.68 3520.72,3061 U61.1 ; U61.1@3533.13,3056.87 3539.25,3063 U61.1@3548,3063
NetU62_1: U62.1 U63.3 | length 96.6
  Top Layer w7: U63.3 3269.87,3010.15 3322.72,3063 U62.1
PC1: P2.7 R10.2 T16.0 | length 186.5
  Bottom Layer w6: T16.0 3646.45,1968.45 R10.2 3652,2023 3688.06,2059.06 P2.7
RESET: H4.10 P1.4 R9.2 U68.40 | length 585
  Bottom Layer w6: P1.4 3396,2728.94 3396,2695 H4.10 3435,2648.63 3456.31,2627.31 3636.76,2627.31 R9.2 3735.79,2664.76 U68.40
RX: P2.14
SCK: P2.10
SCL: P2.11 T2.0 U68.32 U69.14 U70.10 | length 2077.1
  Bottom Layer w6: U70.10 3526.63,1912.63 3528.2,1914.2 3607.2,1914.2 3612.69,1919.69 3612.69,1975.86 3607.41,1981.13 3579,1981.13 ; T2.0 3468,2364 ; U68.32 3570.99,2444.53 3548.83,2466.69 3371.69,2466.69 3368.83,2463.83 3368.83,2404.59 3404.91,2368.5 3463.56,2368.5 3468,2364.06 3468,2364 ; U69.14 4257,2027.66 4213.02,1983.69 4004.28,1983.69 3993.7,1973.1 3861.54,1973.1 3835.3,1999.33 3835.3,2066.7 3803.58,2098.42 P2.11 3700.93,2098.42 3666.83,2064.31 3633.7,2064.31 3615.8,2046.41 3615.8,2005.21 3604.9,1994.31 3592.18,1994.31 3579,1981.13 ; 3468,2364 3468,2291 3520,2239 3520,2179.94 3495,2154.94 3495,2053.45 3567.32,1981.13 3579,1981.13
SDA: P2.13 T1.0 U68.31 U69.15 U70.9 | length 2593
  Signal Layer 1 w6: v2(3408,1812) 3553.5,1957.5 3553.5,2031.91 3566.09,2044.5 3583.91,2044.5 3596.5,2031.91 3596.5,1904.09 3622.09,1878.5 3693.09,1878.5 3723.09,1908.5 4023.91,1908.5 4102,1986.59 4149.59,1986.59 4182,2019 v2(4201,2019)
  Bottom Layer w6: v2(3408,1812) 3408,1826 3420.31,1838.31 3425.93,1838.31 3431.2,1843.59 3431.2,1897.2 3466.31,1932.31 U70.9 ; T1.0 T1.0@3498,2377 ; 3532,2383.03 3525.97,2377 T1.0@3498,2377 ; 3532.03,2383 3532.03,2223.94 3613.97,2142 3664.97,2142 3690.97,2116 3757.9,2116 P2.13 3813.9,2118.1 3850,2082 3850,2001.61 3866.51,1985.1 3988.72,1985.1 U69.15 4071.34,2027.66 4103.31,1995.69 4158.69,1995.69 4182,2019 v2(4201,2019) ; U68.31 3573.7,2424.84 3543.86,2454.69 3493.1,2454.69 3487.83,2449.41 3487.83,2387.17 T1.0@3498,2377
SWCLK: H4.4 P1.3 U68.45 | length 1064.6
  Bottom Layer w6: H4.4 3426.99,2814.01 P1.3 3282.92,2814.01 3243,2774.09 3243,2660.97 3257,2646.97 3273.98,2646.97 3305.64,2615.31 3537.69,2615.31 3594.76,2558.24 3650.76,2558.24 3681,2528 3706.94,2528 3746.46,2488.49 3815.49,2488.49 3834.21,2507.21 U68.45
SWDIO: H4.2 P1.2 U68.46 | length 1175
  Bottom Layer w6: H4.2 3426.96,2864.04 P1.2 3356.91,2868.04 3274.04,2868.04 3231,2825 3231,2656 3283.99,2603.01 3533.01,2603.01 3597.03,2539 3653,2539 3686.5,2505.5 3712.47,2505.5 3741.97,2476 3822,2476 3853.9,2507.9 U68.46
SYNC: R15.1 U69.12 | length 85.6
  Bottom Layer w7: U69.12 4352.16,2078.84 4379.48,2051.52 R15.1
TX: P2.12
VBUS: C8.2 P2.1 R18.2 T15.0 U70.4 | length 840.1
  Signal Layer 1 w16: v1(3399,2014) 3511.55,2014 3559.05,2061.5 3677.5,2061.5 v1(3783,1956)
  Bottom Layer w6: 3268,1997.45 3268,1988 3284.32,1971.68 U70.4 3350.63,1971.68 3369.47,1990.53 3375.53,1990.53 v1(3399,2014)
  Bottom Layer w8: R18.2 3268,1997.45 C8.2
  Bottom Layer w12: T15.0 3295.55,2095 C8.2
  Bottom Layer w14: P2.1 3783,1977 v1(3783,1956)
VCC: C2.1 C3.2 C7.2 H4.1 L1.2 P1.1 P2.9 R1.1 R3.1 R5.1 R7.1 R9.1 R14.2 R15.2 R16.1 R17.2 T14.0 U64.2 U65.2 U66.2 U67.2 U68.17 U68.36 U68.44 | length 6428.5
  Signal Layer 1 w10: v1(3370,1801) 3379.22,1791.78 3379.22,1751.28 3397.19,1733.31 3422.61,1733.31 3463.3,1774 v1(3807,1774)
  Bottom Layer w6: P1.1 3365,2918 3430,2918 3485,2863 H4.1 3578.52,2762.48 R9.1 ; C3.2 3533.18,2523.27 U68.36 3651.73,2523.27 3681.5,2493.5 3707.5,2493.5 3743.5,2457.5 3814.53,2386.47 U68.17 3814.53,2213.53 3793,2192 C7.2@3773.45,2192 ; U68.44 3814.53,2640.53 3835,2661
  Bottom Layer w7: 3743.5,2457.5 3744,2458 3823,2458 3907.69,2542.69 3907.69,2601.09 3899.24,2609.54 3876.69,2609.54 3835,2651.23 3835,2661 C2.1
  Bottom Layer w10: R17.2 3343.45,1822.55 3365,1801 v1(3370,1801) ; U67.2 U67.2@3720.03,1816.76 ; P2.9 3803.46,2078.74 3821.3,2060.9 3821.3,1953 ; R5.1 3802,2851.62 3769.24,2818.87 3761.39,2818.87 R9.1 3735.69,2731.8 3800.72,2731.8 C2.1 ; 3977.48,1953 3981.55,1957.07 ; R15.2 4430.45,2118.45 4466.26,2154.26 4466.26,2280.35 4436.58,2310.03 U65.2
  Bottom Layer w12: U64.2 3300,2499.97 ; R3.1@3385.48,2316 3346.61,2354.87 3321.34,2354.87 3296,2380.21 3296,2495.97 3300,2499.97 ; C3.2 3476.45,2580 3421.03,2580 3341,2499.97 3300,2499.97 ; 3821.3,1953 3825.38,1957.07 3981.55,1957.07 4082.49,1957.07 4084.46,1955.1 4189.55,1955.1 R14.2 4189.55,1934.1 4213.5,1910.15 4213.5,1881.5 4232,1863 4322.92,1863 4481.69,2021.78 4481.69,2058.97 4430.45,2110.22 4430.45,2118.45 ; C2.1 3914.97,2777.49 3914.97,2819 U66.2 ; R7.1@3953.48,1929 3977.48,1953 ; L1.2 4122.45,2498 R1.1 ; R16.1 4345.48,2463 4304.52,2463 R1.1 ; U65.2@4436.58,2310.03 4438.18,2310.03 4468.5,2340.35 4468.5,2370.15 4510,2411.65 4510,2455 4465.76,2499.24 4465.76,2515.95 4433.71,2548 4294,2548 4294,2522.48 R1.1
  Bottom Layer w14: U67.2@3720.03,1816.76 3720.03,1851.72 3772.15,1903.85 ; v1(3807,1774) 3807,1869 3772.15,1903.85 ; 3821.3,1953 3772.15,1903.85
  Bottom Layer w16: 3914.97,2819 4169,2819 4294,2694 4294,2548
VLED: U1.4 U2.4 U3.4 U4.4 U5.4 U6.4 U7.4 U8.4 U9.4 U10.4 U11.4 U12.4 U13.4 U14.4 U15.4 U16.4 U17.4 U18.4 U19.4 U20.4 U21.4 U22.4 U23.4 U24.4 U25.4 U26.4 U27.4 U28.4 U29.4 U30.4 U31.4 U32.4 U33.4 U34.4 U35.4 U36.4 U37.4 U38.4 U39.4 U40.4 U41.4 U42.4 U43.4 U44.4 U45.4 U46.4 U47.4 U48.4 U49.4 U50.4 U51.4 U52.4 U53.4 U54.4 U55.4 U56.4 U57.4 U58.4 U59.4 U60.4 U61.4 U62.4 U63.4 | length 10682.2
  Top Layer w16: U50.4@3129.95,2834.62 3156.17,2808.4 3192.81,2808.4 3241.6,2759.61 U49.4@3271.91,2759.61 ; U8.4@3130.09,1885 3187.64,1885 3213.69,1858.95 3213.69,1845.31 3220,1839 3278,1839 ; U22.4 3184.4,2146.69 3274,2146.69 ; U36.4@3132.09,2523 3132.09,2513.91 3161,2485 3220.91,2485 3232,2473.91 3273,2473.91 ; U63.4 3276,3069.08 3276,3084 3288.69,3096.69 3469,3096.69 ; U35.4 3270.91,2471.82 3273,2473.91 ; U21.4 3271.91,2144.6 3274,2146.69 ; U49.4 U49.4@3271.91,2759.61 ; U7.4@3275.91,1805 3275.91,1824.91 3278,1827 3278,1839 ; 3328,2793.61 3329.95,2795.57 U51.4 ; U9.4 3330.09,1846.09 3323,1839 ; U23.4 3330.09,2151.77 3325,2146.69 ; U37.4 3330.09,2474 3330,2473.91 ; U62.4 3469.91,3095.77 3469,3096.69 ; U6.4 3472.91,1835.91 3476,1839 ; U20.4 3472.91,2144.77 3641.14,2144.77 ; U34.4 3472.91,2472.82 3474,2473.91 ; U48.4@3476.91,2750 3476.91,2783.09 3476,2784 ; U52.4 3530.95,2787.95 3527,2784 ; 3531.09,2150.77 U24.4 ; U38.4 3531.09,2480 3525,2473.91 ; U10.4 3532.09,1839.91 3533,1839 ; U5.4@3670.91,1805 U5.4@3670.91,1807.09 ; U61.4 3670.91,3093.77 3668,3096.69 ; U33.4 3671.91,2471 3669,2473.91 ; U47.4@3671.91,2750 3671.91,2783.91 3672,2784 ; U5.4 3672.91,1834.91 3677,1839 ; U19.4 3674.91,2144.77 3673,2146.69 ; U53.4@3726.95,2833.62 3726.95,2788.95 3722,2784 ; U39.4 3733.09,2478.5 3728.5,2473.91 ; U11.4 3734.09,1839.09 3734,1839 ; U25.4@3734.09,2202 3734.09,2147.77 3733,2146.69 ; U46.4@3867.91,2750 3867.91,2778.91 3873,2784 ; U60.4 3870.91,3093.6 3874,3096.69 ; U18.4 3875.91,2146.6 ; U32.4 3875.91,2469 3871,2473.91 ; U4.4 3876.91,1833.09 ; U26.4@3930.09,2201 3984.18,2146.91 ; U54.4@3933.95,2834.62 3933.95,2787.95 3930,2784 ; 3939,1847 3939.09,1847.09 U12.4 ; U40.4 3940.09,2475 3939,2473.91 ; U12.4@3948.09,1885 U12.4@3949,1885 ; U17.4@4076.91,2110 4076.91,2146.91 ; U45.4@4076.91,2750 4076.91,2781.91 4079,2784 ; U59.4 4077.91,3091.6 4083,3096.69 ; U3.4 4080.91,1836.09 4078,1839 ; U31.4 4081.91,2471.82 4084,2473.91 ; 4148,2474.91 4151.09,2478 U41.4@4151.09,2521 ; 4149.95,2786.05 U55.4 ; U13.4@4150.09,1885 4150.09,1848.91 4158,1841 ; U27.4 4150.09,2175 4122,2146.91 ; U41.4 U41.4@4151.09,2521 ; U41.4@4152.09,2522 U41.4@4151.09,2521 ; U44.4@4285.91,2750 4286,2750.08 4286,2784 ; U58.4 4289.91,3092.6 4294,3096.69 ; U30.4 4292.91,2473.82 4293,2473.91 ; U16.4@4296.91,2120 4296.91,2146.91 ; U56.4@4349.95,2834.62 4349.95,2784.95 4349,2784 ; U28.4 4360.09,2193.83 4407,2146.91 ; U42.4 4361.09,2476 4359,2473.91 ; 4362.09,1845.09 U14.4 ; U57.4 4487.92,3061 4452.23,3096.69 4382,3096.69 ; U29.4@4493.91,2432 4452,2473.91 4432,2473.91 ; U1.4@4495.91,1805 4433,1805 4399,1839 4393,1839 4392.31,1839.69 ; U15.4@4496.91,2113 4463,2146.91 4442,2146.91 ; U43.4 4482.53,2750 4482.53,2731.41 4436.04,2731.41 4432.45,2735 4410,2735 ; U49.4@3271.91,2759.61 3271.91,2764.91 3291,2784 3476,2784 ; 3273,2473.91 3330,2473.91 ; 3274,2146.69 3325,2146.69 ; 3278,1839 3323,1839 ; 3323,1839 3476,1839 ; 3325,2146.69 3673,2146.69 ; 3330,2473.91 3474,2473.91 ; 3469,3096.69 3668,3096.69 ; 3474,2473.91 3525,2473.91 ; 3476,1839 3533,1839 ; 3476,2784 3527,2784 ; 3525,2473.91 3669,2473.91 ; 3527,2784 3672,2784 ; 3533,1839 3677,1839 ; 3668,3096.69 3874,3096.69 ; 3669,2473.91 3728.5,2473.91 ; 3672,2784 3722,2784 ; 3673,2146.69 3733,2146.69 ; 3677,1839 3734,1839 ; 3722,2784 3873,2784 ; 3728.5,2473.91 3871,2473.91 ; 3733,2146.69 3875.83,2146.69 3875.91,2146.6 ; 3734,1839 4078,1839 ; 3871,2473.91 3939,2473.91 ; 3873,2784 3930,2784 ; 3874,3096.69 4083,3096.69 ; 3875.91,2146.6 3876,2146.69 3983.95,2146.69 3984.18,2146.91 ; 3930,2784 4079,2784 ; 3939,2473.91 4084,2473.91 ; 3984.18,2146.91 4076.91,2146.91 ; 4076.91,2146.91 4122,2146.91 ; 4078,1839 4219,1839 4257,1801 U2.4 4329.92,1839 4335.83,1839 4336.52,1839.69 4392.31,1839.69 ; 4079,2784 4286,2784 ; 4083,3096.69 4294,3096.69 ; 4084,2473.91 4293,2473.91 ; 4122,2146.91 4296.91,2146.91 ; 4286,2784 4349,2784 ; 4293,2473.91 4359,2473.91 ; 4294,3096.69 4382,3096.69 ; 4296.91,2146.91 4407,2146.91 ; 4349,2784 4400.18,2784 4415.18,2769 ; 4359,2473.91 4410,2473.91 ; 4382,3096.69 4409.99,3068.7 4423.48,3068.7 4443.21,3048.96 4443.21,3018.85 4415.18,2990.82 4415.18,2769 ; 4392.31,1839.69 4407,1854.37 4407,2146.91 ; 4407,2146.91 4442,2146.91 ; 4410,2473.91 4410,2735 ; 4410,2473.91 4432,2473.91 ; 4410,2735 4410,2747.09 4415.18,2752.27 4415.18,2769 ; 4432,2473.91 4447.5,2458.41 4447.5,2234.52 4442,2229.02 4442,2146.91
VM: P2.3
pads on no net: H4.6 H4.7 H4.8 H4.9 M1.6 M2.6 M3.6 M4.6 M5.6 M6.6 M7.6 M8.6 P2.0 U63.1 U68.3 U68.4 U68.7 U68.8 U68.9 U68.10 U68.14 U68.15 U68.16 U68.19 U68.20 U68.21 U68.22 U68.23 U68.33 U68.34 U68.37 U68.38 U68.39 U68.41 U68.47 U68.48 U69.2 U69.3 U69.4 U69.5 U69.6 U69.7 U69.9 U69.10 U69.13 U69.23 U69.27 U69.28 U70.6 U70.11

## Polygon pours and split planes (outlines as drawn)
CAP9 on Top Layer "CAP9" (solid, pour order 18): 3110,1700 3110,1846 4527,1846 4528,1845 4525,1842 4525,1700
CAP8 on Top Layer "CAP8" (solid, pour order 16): 3110,1994 4524,1994 4516,1990 4516,1910 4516,1829 3106,1829 3110,1829
CAP7 on Top Layer "CAP7" (solid, pour order 14): 3108,2147 4517,2148 4517,1982 4525,1981 4524,1982 3108,1981
CAP6 on Top Layer "CAP6" (solid, pour order 12): 3108,2298 4525,2297 4526,2298 4519,2297 4519,2151 3102,2151 3108,2151
CAP5 on Top Layer "CAP5" (solid, pour order 10): 3112,2477 3107,2477 4517,2477 4517,2311 4533,2295 4513,2315 3112,2315
CAP4 on Top Layer "CAP4" (solid, pour order 8): 3111,2629 4523,2629 4515,2629 4515,2476 3111,2476
CAP3 on Top Layer "CAP3" (solid, remove dead copper, pour order 6): 3113,2781.32 3106.32,2781.32 4526,2781.32 4526,2617 4527,2616 4525,2618 3113,2618
CAP2 on Top Layer "CAP2" (solid, remove dead copper, pour order 4): 3109,2927 3109,2777 3103,2777 4526,2777 4526,2920
CAP1 on Top Layer "CAP1" (solid, remove dead copper, pour order 2): 3099,2933 3112,2933 3112,3109 4525,3110 4526,3109 4526,2931
GND on Signal Layer 2 "GND" (hatched 90Degree grid 20 track 8, remove dead copper, pour order 20): 3105,1690 3105,3110 4525,3110 4525,1690

## Silkscreen, mask and mechanical layers (free items; w line width, h text height)
Bottom Overlay:
  lines w10: 3338,2889 3338,2941 ; 3339,2942 3388,2942 ; 3340,2887 3389,2887 3389,2941 ; 3459,2451 3459,2472 ; 4057,2850 4057,2978 4385,2978 ; 4058,2867 4061,2870 ; 4060,2853 4386,2853 4386,2979 ; 4386,2995 4387,2996
  text "artemd@" at 4365,2919.99 h40
  text "vcc" at 3319,2901 h40
  text "mit.edu" at 4359,2874 h40
  text "gnd" at 3332,2640 h40
Mechanical 1:
  the board outline again, w6
Mechanical 13:
  the board outline again, w12

## Dimensions
3105,3110 to 3105,1690 on Mechanical 13
4525,3110 to 3105,3110 on Mechanical 13

## Text inside footprints (layer, text, board x,y; h text height)
H4: Bottom Overlay "1" at 3505,2918.99 h39.37 r90; Bottom Overlay "9" at 3505,2600.09 h39.37 r90
U1: Top Overlay "o" at 4448.03,1728.94 h30
U2: Top Overlay "o" at 4236.03,1723.94 h30
U3: Top Overlay "o" at 4025.03,1727.94 h30
U4: Top Overlay "o" at 3821.03,1727.94 h30
U5: Top Overlay "o" at 3617.03,1727.94 h30
U6: Top Overlay "o" at 3417.03,1727.94 h30
U7: Top Overlay "o" at 3215.03,1725.94 h30
U8: Top Overlay "o" at 3184.97,1962.06 h30 r180
U9: Top Overlay "o" at 3385.97,1962.06 h30 r180
U10: Top Overlay "o" at 3587.97,1961.06 h30 r180
U11: Top Overlay "o" at 3789.97,1961.06 h30 r180
U12: Top Overlay "o" at 3994.97,1962.06 h30 r180
U13: Top Overlay "o" at 4204.97,1960.06 h30 r180
U14: Top Overlay "o" at 4417.97,1962.06 h30 r180
U15: Top Overlay "o" at 4446.03,2035.94 h30
U16: Top Overlay "o" at 4236.03,2035.94 h30
U17: Top Overlay "o" at 4026.03,2033.94 h30
U18: Top Overlay "o" at 3820.03,2033.94 h30
U19: Top Overlay "o" at 3619.03,2033.94 h30
U20: Top Overlay "o" at 3417.03,2035.94 h30
U21: Top Overlay "o" at 3216.03,2033.94 h30
U22: Top Overlay "o" at 3185.97,2278.06 h30 r180
U23: Top Overlay "o" at 3385.97,2278.06 h30 r180
U24: Top Overlay "o" at 3586.97,2278.06 h30 r180
U25: Top Overlay "o" at 3789.97,2277.06 h30 r180
U26: Top Overlay "o" at 3995.97,2278.06 h30 r180
U27: Top Overlay "o" at 4205.97,2278.06 h30 r180
U28: Top Overlay "o" at 4415.97,2277.06 h30 r180
U29: Top Overlay "o" at 4448.03,2354.94 h30
U30: Top Overlay "o" at 4237.03,2352.94 h30
U31: Top Overlay "o" at 4026.03,2353.94 h30
U32: Top Overlay "o" at 3820.03,2353.94 h30
U33: Top Overlay "o" at 3616.03,2353.94 h30
U34: Top Overlay "o" at 3417.03,2353.94 h30
U35: Top Overlay "o" at 3215.03,2353.94 h30
U36: Top Overlay "o" at 3183.97,2600.06 h30 r180
U37: Top Overlay "o" at 3385.97,2599.06 h30 r180
U38: Top Overlay "o" at 3586.97,2599.06 h30 r180
U39: Top Overlay "o" at 3788.97,2599.06 h30 r180
U40: Top Overlay "o" at 3995.97,2599.06 h30 r180
U41: Top Overlay "o" at 4206.97,2599.06 h30 r180
U42: Top Overlay "o" at 4416.97,2599.06 h30 r180
U43: Top Overlay "o" at 4449.03,2672.94 h30
U44: Top Overlay "o" at 4237.03,2672.94 h30
U45: Top Overlay "o" at 4027.03,2672.94 h30
U46: Top Overlay "o" at 3820.03,2672.94 h30
U47: Top Overlay "o" at 3617.03,2672.94 h30
U48: Top Overlay "o" at 3417.03,2672.94 h30
U49: Top Overlay "o" at 3216.03,2672.94 h30
U50: Top Overlay "o" at 3183.97,2910.06 h30 r180
U51: Top Overlay "o" at 3385.83,2911.67 h30 r180
U52: Top Overlay "o" at 3586.83,2911.67 h30 r180
U53: Top Overlay "o" at 3789.97,2912.06 h30 r180
U54: Top Overlay "o" at 3994.97,2911.06 h30 r180
U55: Top Overlay "o" at 4205.83,2911.67 h30 r180
U56: Top Overlay "o" at 4416.97,2912.06 h30 r180
U57: Top Overlay "o" at 4434.03,2985.94 h30
U58: Top Overlay "o" at 4234.03,2985.94 h30
U59: Top Overlay "o" at 4022.03,2983.94 h30
U60: Top Overlay "o" at 3815.03,2984.94 h30
U61: Top Overlay "o" at 3615.03,2983.94 h30
U62: Top Overlay "o" at 3414.03,2985.94 h30
U63: Top Overlay "o" at 3214.03,2985.94 h30